# Allegro board motherboard.brd
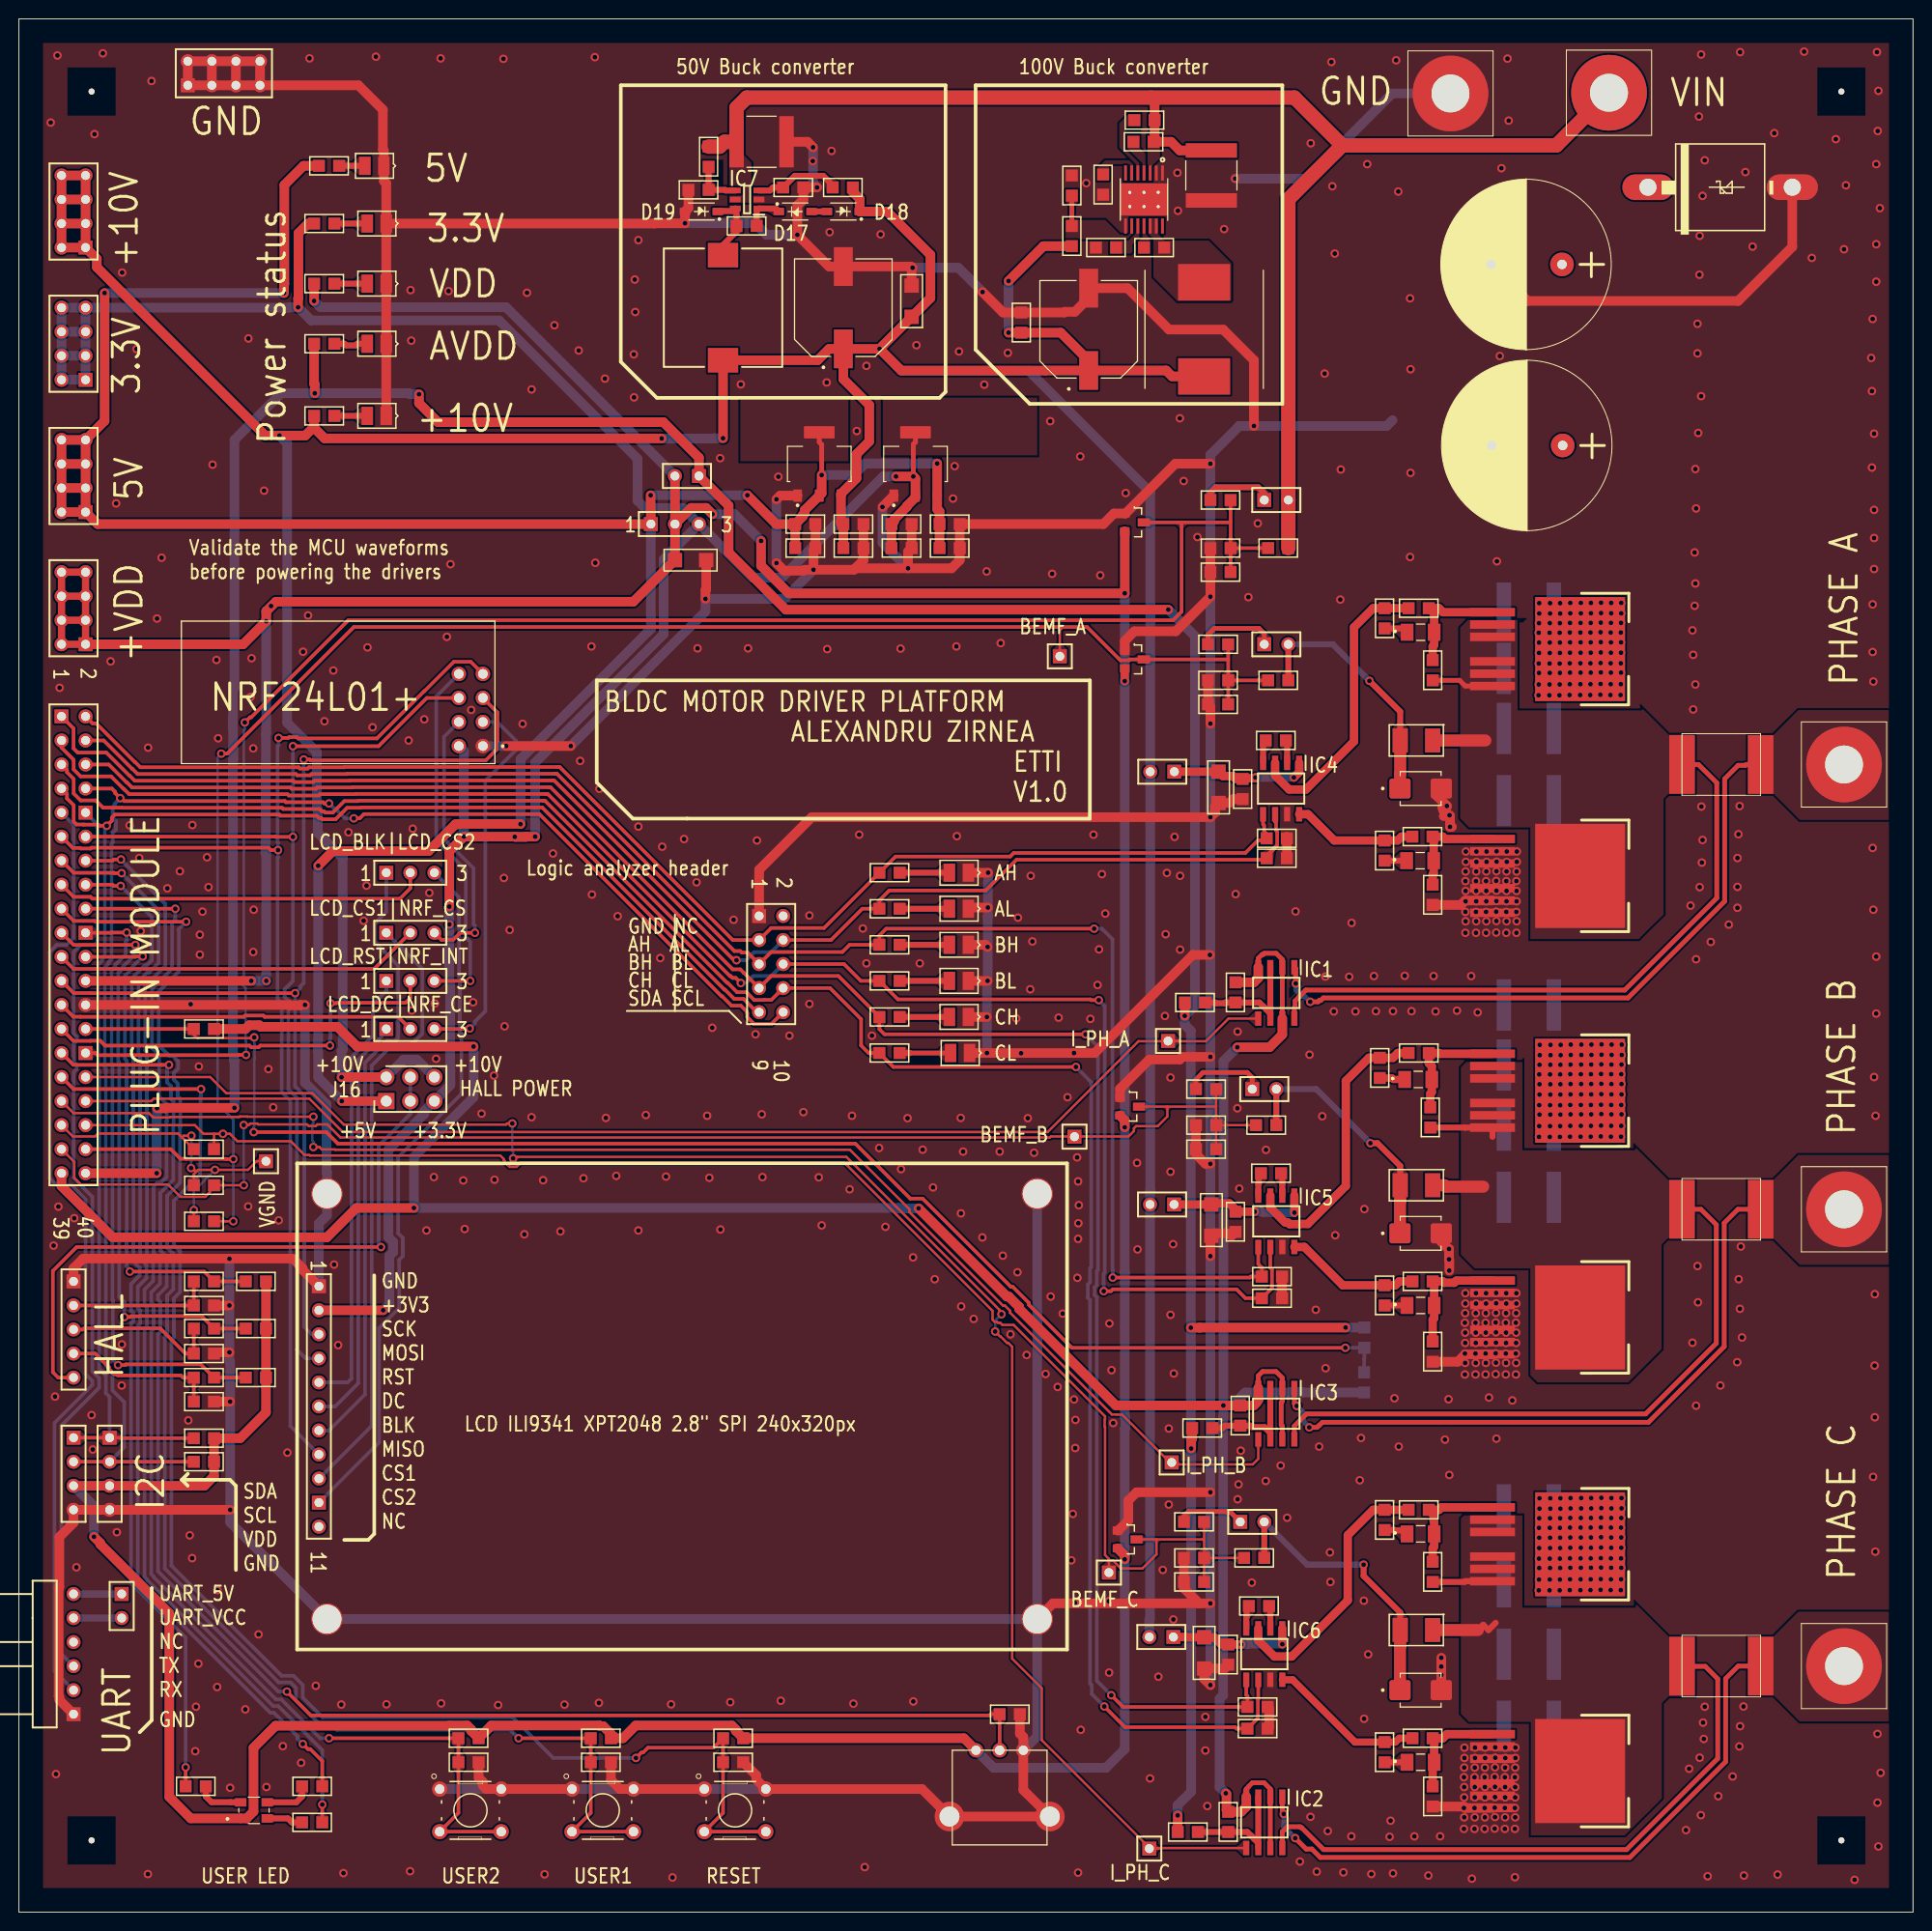
[diagram p0: board, top side]
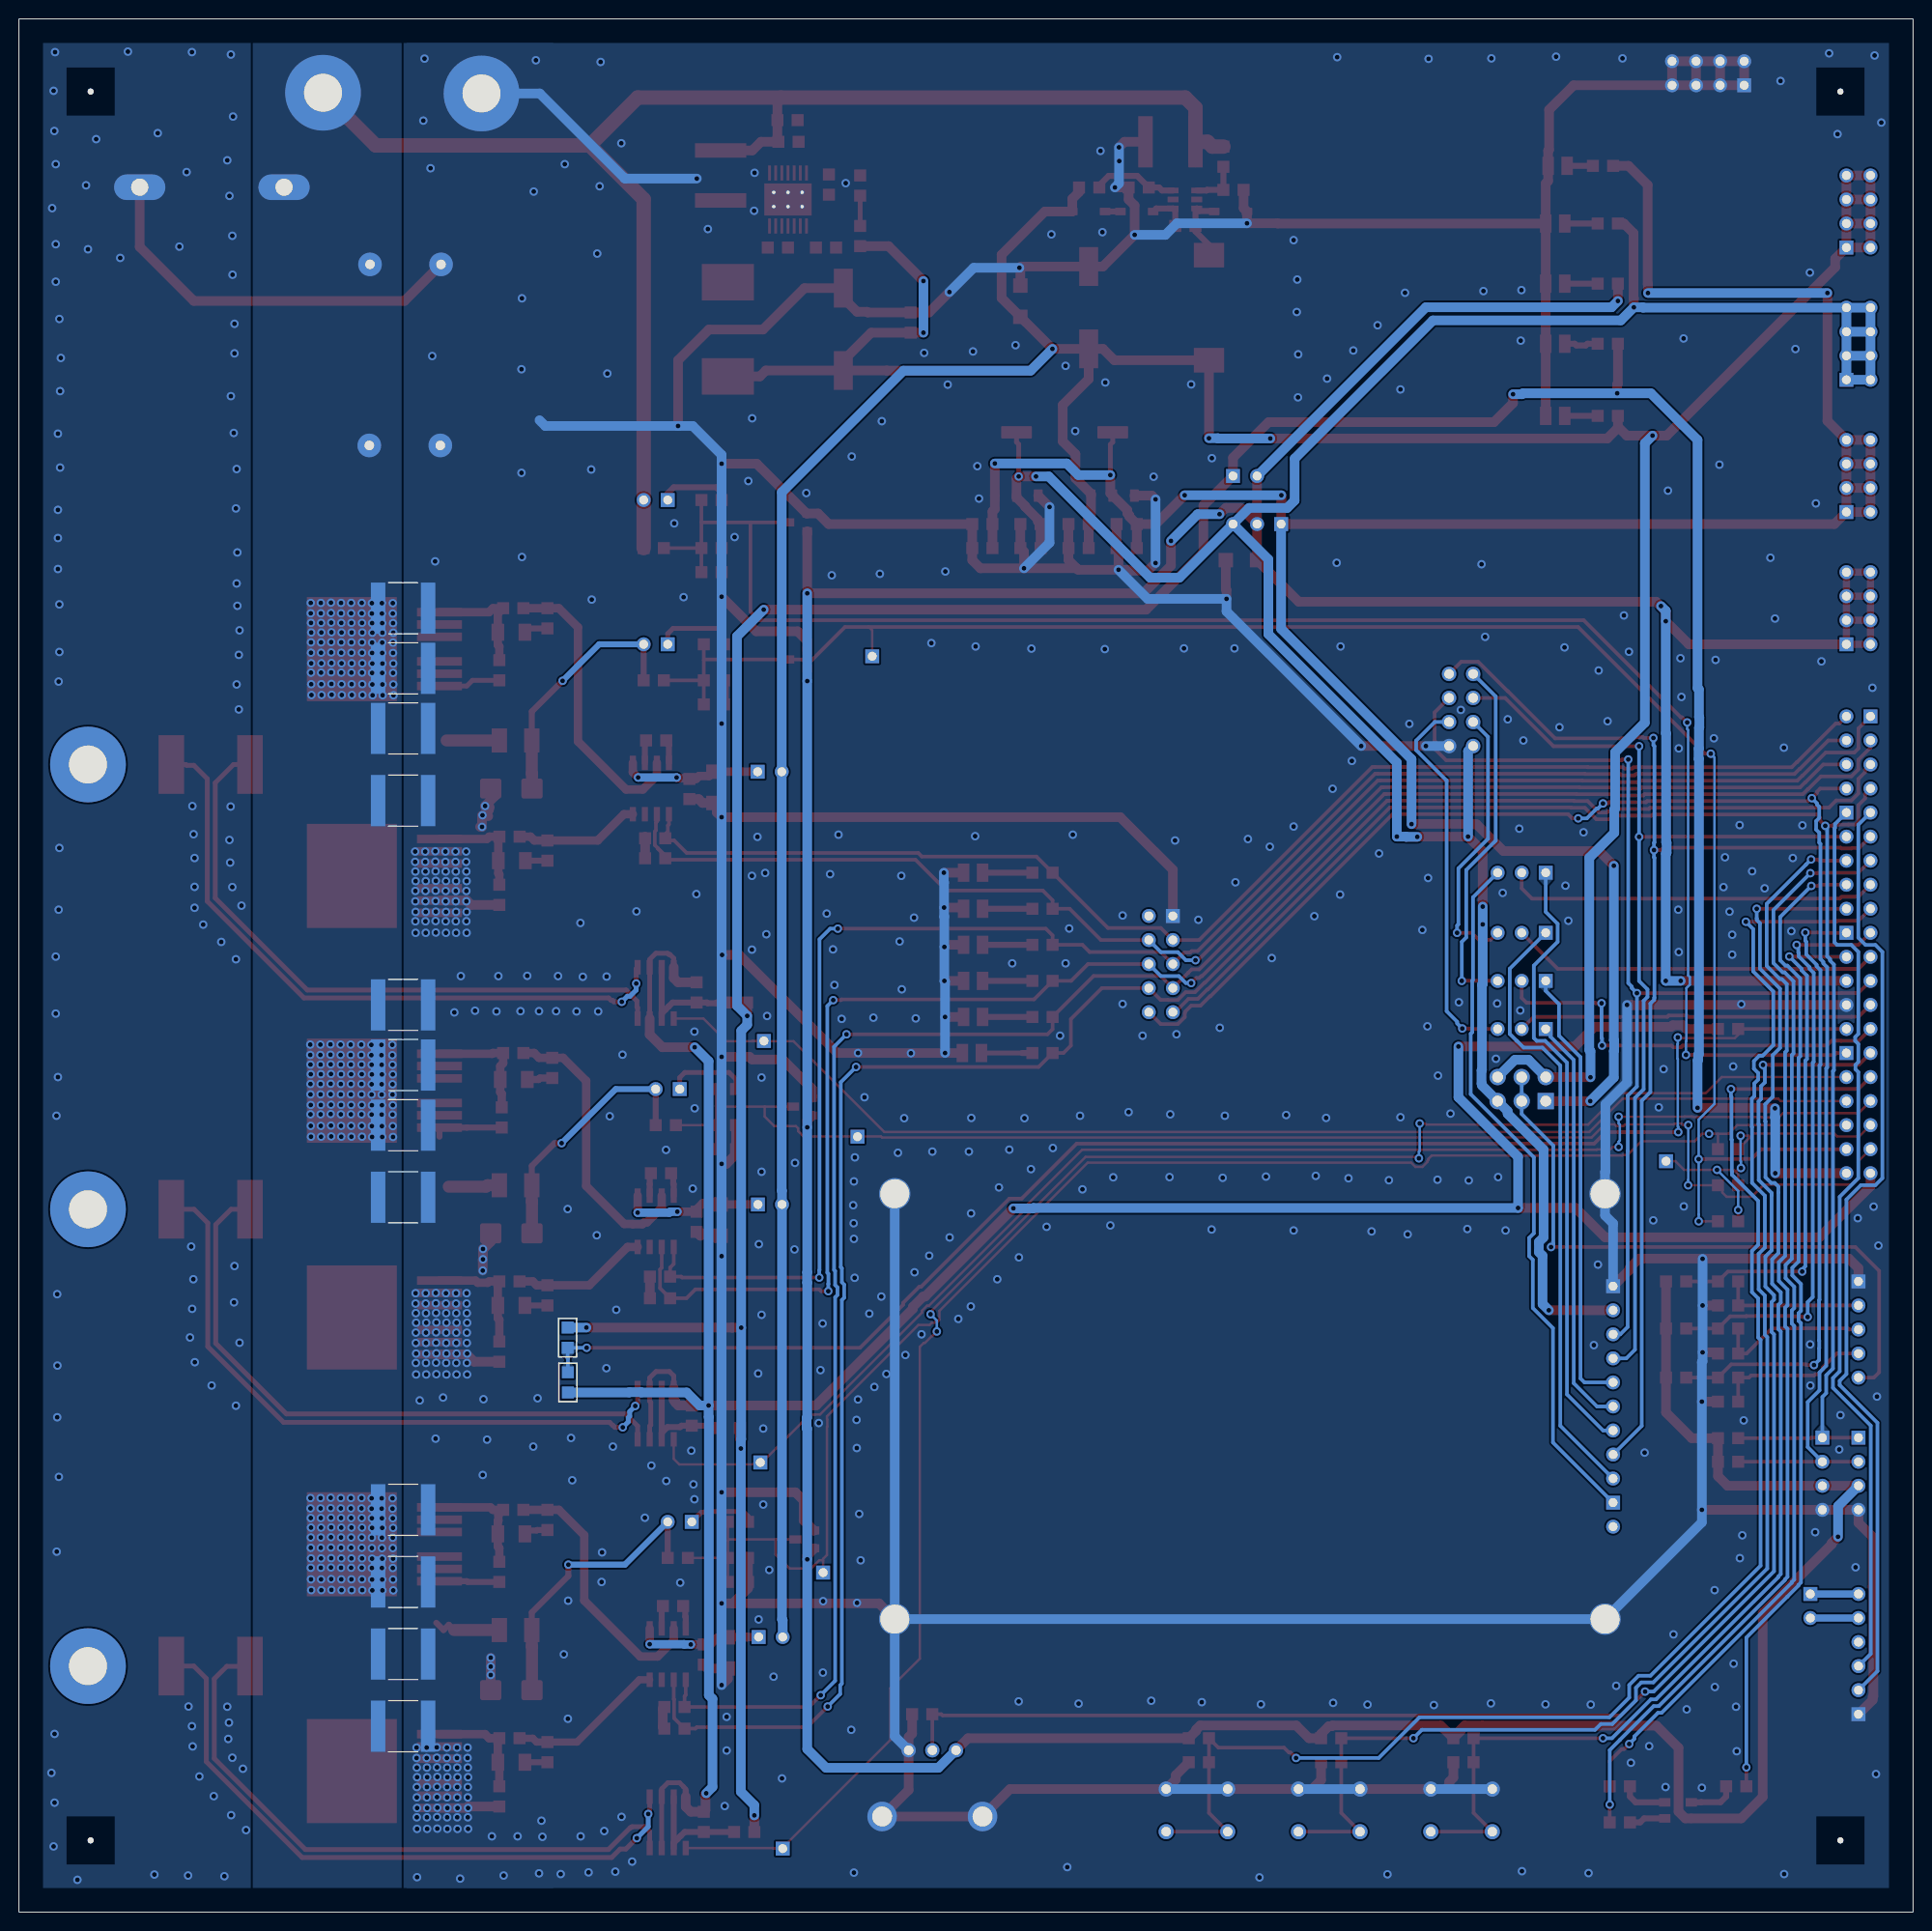
[diagram p1: board, bottom side, seen from below]

Outline 200 x 200 mm; copper layers: TOP, BOTTOM. Coordinates in mm from the lower left corner of the outline.
Outline path: rectangle 0,0 200,200

## Design rules (mm)
constraint set DEFAULT: min track width 0.508, pair gap 0.254

## Placement (name value [footprint] x y rotation side)
C1  1n  [SMC0805]  127.69 127.58 180 top
C2  1n  [SMC0805]  126.42 80.59 180 top
C3  1n  [SMC0805]  125.15 34.87 180 top
C4  1n  [SMC0805]  18.47 53.92 0 top
C5  1n  [SMC0805]  18.47 64.08 0 top
C6  1n  [SMC0805]  18.47 59 0 top
C7  1n  [SMC0805]  74.35 15.82 0 top
C8  1n  [SMC0805]  103.56 20.9 0 top
C9  1n  [SMC0805]  60.38 15.82 0 top
C10  1n  [SMC0805]  46.41 15.82 0 top
C11  10u  [CAPC5750X330N]  159.44 137.74 180 bottom
C12  10u  [CAPC5750X330N]  159.44 131.39 180 bottom
C13  10u  [CAPC5750X330N]  159.44 117.42 180 bottom
C14  10u  [CAPC5750X330N]  159.44 125.04 180 bottom
C15  10u  [CAPC5750X330N]  159.44 95.83 180 bottom
C16  10u  [CAPC5750X330N]  159.44 89.48 180 bottom
C17  10u  [CAPC5750X330N]  159.44 83.13 180 bottom
C18  10u  [CAPC5750X330N]  159.44 75.51 180 bottom
C19  10u  [CAPC5750X330N]  159.44 19.63 180 bottom
C20  10u  [CAPC5750X330N]  159.44 42.49 180 bottom
C21  10u  [CAPC5750X330N]  159.44 34.87 180 bottom
C22  10u  [CAPC5750X330N]  159.44 27.25 180 bottom
C23  1n  [SMC0805]  18.47 93.29 0 top
C24  1u  [SMC0805]  128.45 96.09 90 top
C25  1u  [SMC0805]  127.69 8.46 90 top
C26  1u  [SMC0805]  128.96 51.38 90 top
C27  100n  [SMC0805]  129.21 119.71 270 top
C28  47u  [SMC1206]  126.67 120.47 270 top
C29  10u  [SMC0805]  133.78 123.77 180 top
C30  100n  [SMC0805]  128.45 73.99 270 top
C31  47u  [SMC1206]  125.91 74.75 270 top
C32  10u  [SMC0805]  133.27 78.05 180 top
C33  100n  [SMC0805]  127.69 28.27 270 top
C34  47u  [SMC1206]  125.15 29.03 270 top
C35  10u  [SMC0805]  132 32.33 180 top
C36  100n  [SMC0805]  118.8 175.84 0 top
C37  2.2u  [SMC0805]  105.84 168.99 270 top
C38  560u  [CAP_EEEFT1V561AP]  112.95 167.21 90 top
C39  10n  [SMC0805]  119.81 187.02 180 top
C40  10n  [SMC0805]  114.48 181.43 90 top
C41  2.2u  [SMC0805]  113.72 175.84 0 top
C42  10u  [CAPC5750X330N]  125.91 183.46 270 top
C43  1n  [SMC0805]  87.05 146.63 0 top
C44  1u  [SMC0805]  87.05 144.09 0 top
C45  1u  [SMC0805]  81.97 146.63 0 top
C46  1n  [SMC0805]  81.97 144.09 0 top
C47  100n  [SMC0805]  77.9 178.13 180 top
C48  47u  [SMC1206]  94.26 168.53 90 top
C49  560u  [CAP_EEEFT1V561AP]  87.05 169.49 90 top
C50  1u  [SMC0805]  72.82 181.94 180 top
C51  10u  [CAPC5750X330N]  78.41 187.02 0 top
C52  1n  [SMC0805]  97.21 146.63 0 top
C53  1u  [SMC0805]  97.21 144.09 0 top
C54  1u  [SMC0805]  92.13 146.63 0 top
C55  1n  [SMC0805]  92.13 144.09 0 top
C56  2200u 63V  [UPW1J222MHD]  159.13 174.07 180 top
C57  2200u 63V  [UPW1J222MHD]  159.21 154.94 180 top
C58  47u  [SMC1206]  69.27 142.82 0 top
C59  1n  [SMC0805]  127.94 141.55 180 top
D1  MBRS1100T3G  [DIOM5436X247N]  148.01 118.69 0 top
D2  MBRS1100T3G  [DIOM5436X247N]  148.01 71.7 0 top
D3  MBRS1100T3G  [DIOM5436X247N]  148.01 23.44 0 top
D4  LL-R3528RGBC-008-B  [LED_LL-R3528RGBC-008-B]  24.82 10.74 0 top
D5  LED  [SMD0805]  100.25 109.8 180 top
D6  LED  [SMD0805]  100.25 105.99 180 top
D7  LED  [SMD0805]  100.25 102.18 180 top
D8  LED  [SMD0805]  100.25 98.37 180 top
D9  LED  [SMD0805]  100.25 94.56 180 top
D10  LED  [SMD0805]  100.38 90.75 180 top
D11  SS26FL  [DIO_SS26FL]  148.01 135.2 0 top
D12  SS26FL  [DIO_SS26FL]  147.95 111.07 0 top
D13  SS26FL  [DIO_SS26FL]  147.75 87.96 0 top
D14  SS26FL  [DIO_SS26FL]  148.01 64.08 0 top
D15  SS26FL  [DIO_SS26FL]  148.01 39.95 0 top
D16  SS26FL  [DIO_SS26FL]  148.01 15.82 0 top
D17  BAT41  [SOD3716X135N]  81.97 179.65 0 top
D18  MMSZ7V5T1G  [SOD3716X135N]  87.05 179.65 180 top
D19  BAT41  [SOD3716X135N]  72.06 179.65 180 top
D20  15KP48CA  [DIOAD885W125L910D885]  179.63 182.22 0 top
D21  LED  [SMD0805]  38.79 158.06 180 top
D22  LED  [SMD0805]  38.53 184.48 180 top
D23  LED  [SMD0805]  38.79 178.38 180 top
D24  LED  [SMD0805]  38.79 172.03 180 top
D25  LED  [SMD0805]  38.79 165.68 180 top
DN1  BAT54  [SMSOT23123]  116.76 131.39 270 top
DN2  BAT54  [SMSOT23123]  116.26 84.15 270 top
DN3  BAT54  [SMSOT23123]  116 38.43 270 top
DN4  BAT54  [SMSOT23123]  116.76 145.87 270 top
IC1  INA240A2EDRQ1  [SOIC127P600X175-8N]  132.77 97.1 270 top
IC2  INA240A2EDRQ1  [SOIC127P600X175-8N]  131.5 9.47 270 top
IC3  INA240A2EDRQ1  [SOIC127P600X175-8N]  132.77 52.65 270 top
IC4  MIC4104YM  [SOIC127P599X173-8N]  133.27 118.69 270 top
IC5  MIC4104YM  [SOIC127P599X173-8N]  132.77 72.97 270 top
IC6  MIC4104YM  [SOIC127P599X173-8N]  131.5 27.25 270 top
IC7  MCP16331T-E_CH  [SOT95P280X145-6N]  76.89 180.92 180 top
J1  PHASE A  [POWER_PAD]  192.71 121.23 0 top
J2  PHASE B  [POWER_PAD]  192.71 74.24 0 top
J3  PHASE C  [POWER_PAD]  192.71 25.98 0 top
J4  HEADER 1x2  [BLKCON100VHTM1SQW1002]  131.5 133.93 0 top
J5  HEADER 1x2  [BLKCON100VHTM1SQW1002]  130.23 86.94 0 top
J6  HEADER 1x2  [BLKCON100VHTM1SQW1002]  128.96 41.22 0 top
J7  HEADER 4  [BLKCON100VHTM1SQW1004]  5.77 50.11 270 top
J8  HEADER 4  [BLKCON100VHTM1SQW1004]  9.58 50.11 270 top
J9  JUMPER1  [BLKCON100VHTM1SQW1002]  10.85 33.6 270 top
J10  CON6  [BLKCON100RHTM1SQW4256]  5.77 20.9 90 top
J11  30340-5002HB  [BLKCON100VHTM2OEW20040]  4.5 126.31 270 top
J12  HEADER 4X2  [BLKCON100VHTM2OEW2008]  7.04 175.84 90 top
J13  HEADER 4X2  [BLKCON100VHTM2OEW2008]  7.04 147.9 90 top
J14  HEADER 4X2  [BLKCON100VHTM2OEW2008]  7.04 161.87 90 top
J15  HEADER 4X2  [BLKCON100VHTM2OEW2008]  7.04 133.93 90 top
J16  10129381-906002BLF  [HDRV6W67P254_2X3_762X483X858P]  38.79 85.67 0 top
J17  HEADER 4X2  [BLKCON100VHTM2OEW2008]  17.83 192.99 0 top
J18  CON5  [BLKCON100VHTM1SQW1005]  5.77 66.62 270 top
J19  CON3  [BLKCON100VHTM1SQW1003]  38.79 109.8 0 top
J20  CON3  [BLKCON100VHTM1SQW1003]  38.79 103.45 0 top
J21  CON3  [BLKCON100VHTM1SQW1003]  38.79 98.37 0 top
J22  CON3  [BLKCON100VHTM1SQW1003]  38.79 93.29 0 top
J23  CON1  [BLKCON100VHTM1SQW1001]  121.34 92.02 0 top
J24  HEADER 5X2  [BLKCON100VHTM2OEW20010]  78.16 105.23 270 top
J25  CON1  [BLKCON100VHTM1SQW1001]  121.72 47.5 0 top
J26  CON1  [BLKCON100VHTM1SQW1001]  119.35 6.71 0 top
J27  CON1  [BLKCON100VHTM1SQW1001]  109.91 132.66 0 top
J28  CON1  [BLKCON100VHTM1SQW1001]  111.46 81.92 0 top
J29  CON1  [BLKCON100VHTM1SQW1001]  115.09 35.86 0 top
J30  CON1  [BLKCON100VHTM1SQW1001]  26.09 79.32 0 top
J31  CON11  [ILI9341_2_8INCH]  31.67 53.42 270 top
J32  HEADER 1x2  [BLKCON100VHTM1SQW1002]  122 120.47 180 top
J33  HEADER 1x2  [BLKCON100VHTM1SQW1002]  121.97 74.75 180 top
J34  HEADER 1x2  [BLKCON100VHTM1SQW1002]  121.89 29.06 180 top
J35  VIN  [POWER_PAD]  167.89 192.2 0 top
J36  GND  [POWER_PAD]  151.16 192.13 0 top
J37  HEADER 1x2  [BLKCON100VHTM1SQW1002]  131.5 149.17 0 top
J38  HEADER 3  [BLKCON100VHTM1SQW1003]  66.73 146.63 0 top
J39  HEADER 1x2  [BLKCON100VHTM1SQW1002]  71.81 151.71 180 top
L1  100u  [INDM1250X1250X600]  125.15 167.21 270 top
L2  100uH  [INDP125125X785N]  74.35 169.49 270 top
NOREF  -  [unnamed]  192.43 7.57 0 top
NOREF#2  -  [unnamed]  7.67 7.57 0 top
NOREF#3  -  [unnamed]  7.67 192.33 0 top
NOREF#4  -  [unnamed]  192.43 192.33 0 top
Q1  IPB039N10N3_G  [PG-TO263-3]  169.6 133.42 180 top
Q2  IPB039N10N3_G  [PG-TO263-3]  169.6 86.77 180 top
Q3  IPB039N10N3_G  [PG-TO263-3]  169.6 38.85 180 top
Q4  IPB039N10N3_G  [PG-TO263-3]  169.6 109.46 180 top
Q5  IPB039N10N3_G  [PG-TO263-3]  169.6 62.81 180 top
Q6  IPB039N10N3_G  [PG-TO263-3]  169.6 14.89 180 top
R1  47k  [SMR0805]  134.04 130.12 180 top
R2  47k  [SMR0805]  125.55 133.93 0 top
R3  47k  [SMR0805]  132.77 83.13 180 top
R4  47k  [SMR0805]  124.28 86.94 0 top
R5  47k  [SMR0805]  131.5 37.41 180 top
R6  47k  [SMR0805]  123.01 41.22 0 top
R7  5.1k  [SMR0805]  127.69 130.12 180 top
R8  5.1k  [SMR0805]  126.42 83.13 180 top
R9  5.1k  [SMR0805]  125.15 37.41 180 top
R10  3.3R  [SMR1210]  149.28 123.77 180 top
R11  110k  [SMR0805]  18.47 80.59 0 top
R12  110k  [SMR0805]  18.47 76.78 0 top
R13  3.3R  [SMR1210]  149.28 76.78 180 top
R14  110k  [SMR0805]  18.47 72.97 0 top
R15  3.3R  [SMR1210]  149.28 29.79 180 top
R16  4k7  [SMR0805]  20.6 47.57 180 top
R17  4k7  [SMR0805]  20.6 50.06 180 top
R18  2k2  [SMR0805]  26.09 56.46 180 top
R19  3k3  [SMR0805]  18.47 56.46 0 top
R20  2k2  [SMR0805]  26.09 66.62 180 top
R21  2k2  [SMR0805]  26.09 61.65 180 top
R22  3k3  [SMR0805]  18.47 66.62 0 top
R23  3k3  [SMR0805]  18.47 61.65 0 top
R24  10k  [SMR0805]  74.35 18.36 0 top
R25  1k  [SMR0805]  29.9 9.47 0 top
R26  1k  [SMR0805]  29.9 13.28 0 top
R27  1k  [SMR0805]  19.74 13.28 180 top
R28  10k  [RK09D117000B]  103.56 17.09 180 top
R29  10k  [SMR0805]  60.38 18.36 0 top
R30  1k  [SMR0805]  90.86 109.8 0 top
R31  1k  [SMR0805]  90.86 105.99 0 top
R32  10k  [SMR0805]  46.41 18.36 0 top
R33  1k  [SMR0805]  90.86 102.18 0 top
R34  1k  [SMR0805]  90.86 98.37 0 top
R35  1k  [SMR0805]  90.86 94.56 0 top
R36  1k  [SMR0805]  90.86 90.75 0 top
R37  0.001R  [CSS2H-3920R]  179.76 121.23 0 top
R38  0.001R  [CSS2H-3920R]  179.76 74.24 0 top
R39  0.001R  [CSS2H-3920R]  179.76 25.98 0 top
R40  10k  [SMR0805]  142.04 57.02 270 bottom
R41  0R  [SMR0805]  123.11 96.09 0 top
R42  0R  [SMR0805]  122.35 8.46 0 top
R43  0R  [SMR0805]  123.88 51.13 0 top
R44  20R  [SMR0805]  146.74 137.74 0 top
R45  5R  [SMR0805]  144.2 137.74 270 top
R46  330k  [SMR0805]  149.28 130.12 90 top
R47  20R  [SMR0805]  149.26 113.61 180 top
R48  10k  [SMR0805]  131.75 113.44 0 top
R49  10k  [SMR0805]  131.75 111.33 0 top
R50  5R  [SMR0805]  144.2 111.07 90 top
R51  330k  [SMR0805]  149.28 108.53 270 top
R52  20R  [SMR0805]  146.74 90.75 0 top
R53  5R  [SMR0805]  143.69 90.25 270 top
R54  330k  [SMR0805]  149.02 82.88 90 top
R55  10k  [SMR0805]  131.24 67.13 0 top
R56  10k  [SMR0805]  131.24 64.85 0 top
R57  20R  [SMR0805]  149.28 66.62 180 top
R58  5R  [SMR0805]  144.2 64.08 90 top
R59  330k  [SMR0805]  149.28 60.27 270 top
R60  20R  [SMR0805]  146.74 42.49 0 top
R61  10k  [SMR0805]  129.72 21.67 0 top
R62  10k  [SMR0805]  129.72 19.38 0 top
R63  5R  [SMR0805]  144.2 42.49 270 top
R64  330k  [SMR0805]  149.28 34.87 90 top
R65  20R  [SMR0805]  149.28 18.36 180 top
R66  5R  [SMR0805]  144.2 15.82 90 top
R67  330k  [SMR0805]  149.28 13.28 270 top
R68  10k  [SMR0805]  111.18 178.13 270 top
R69  402k  [SMR0805]  117.78 189.31 0 top
R70  2k  [SMR0805]  111.18 183.46 270 top
R71  110k  [SMR0805]  72.82 186.51 270 top
R72  110k  [SMR0805]  88.06 182.19 180 top
R73  10k  [SMR0805]  80.7 182.19 0 top
R74  1k  [SMR0805]  31.17 158.06 0 top
R75  1k  [SMR0805]  31.67 184.48 0 top
R76  1k  [SMR0805]  31.17 178.38 0 top
R77  1k  [SMR0805]  31.17 172.03 0 top
R78  1k  [SMR0805]  31.17 165.68 0 top
R79  47k  [SMR0805]  134.04 144.09 180 top
R80  47k  [SMR0805]  125.81 149.17 0 top
R81  5.1k  [SMR0805]  127.94 144.09 180 top
RT1  10k NTC  [SMR0805]  142.06 61.75 270 bottom
SW1  B3F-1000  [SW_B3F-1000]  75.62 10.74 0 top
SW2  B3F-1000  [SW_B3F-1000]  61.65 10.74 0 top
SW3  B3F-1000  [SW_B3F-1000]  47.68 10.74 0 top
U1  NRF24L01P-MODULE-PCB  [XCVR_NRF24L01P-MODULE-PCB]  33.71 128.85 180 top
U2  LM5161PWPR  [IC_TPS27S100BPWPR]  118.8 180.92 270 top
U3  AMS1117-5V  [SOT229P700X180-4N]  84.51 152.98 0 top
U4  AMS1117-33  [SOT229P700X180-4N]  94.67 152.98 0 top

## Library data of the parts
C1-C37 C39-C48 C50-C55 C58 C59 = CAP NP
C38 C49 C56 C57 = CAP
D1-D3 = DIODE SCHOTTKY
D4 = LL-R3528RGBC-008-B
D5-D10 D21-D25 = LED_0
D11-D17 D19 = DIODE
D18 = DIODE ZENER
D20 = DIODE TAZ BI-DIR_0
DN1-DN4 = DIODE_DUAL_RS_AKJ
IC1-IC3 = INA240A2EDRQ1
IC4-IC6 = MIC4104YM
IC7 = MCP16331T-E_CH
J1-J3 J23 J25-J30 J35 J36 = CON1
J4-J6 J32-J34 J37 J39 = HEADER 1x2
J7 J8 = HEADER 4
J9 = JUMPER1
J10 = CON6
J11 = 30340-5002HB
J12-J15 J17 = HEADER 4X2
J16 = 10129381-906002BLF
J18 = CON5
J19-J22 = CON3
J24 = HEADER 5X2
J31 = CON11_0
J38 = HEADER 3
L1 L2 = INDUCTOR
Q1-Q6 = IPB039N10N3_G
R1-R27 R29-R81 = RESISTOR
R28 = POT_0
RT1 = NTC
SW1-SW3 = B3F-1000
U1 = NRF24L01P-MODULE-PCB
U2 = LM5161PWPR_1
U3 U4 = AMS1117-33_2

## Footprints (pads in the part's own frame, mm; a bottom-side part is the same pattern mirrored in y, then rotated)
BLKCON100RHTM1SQW4256
  rect 1.473x1.473 hole 0.94: 1(0,0)
  round 1.473 hole 0.94: 2(2.54,0) 3(5.08,0) 4(7.62,0) 5(10.16,0) 6(12.7,0)
BLKCON100VHTM1SQW1001
  rect 1.473x1.473 hole 0.94: 1(0,0)
BLKCON100VHTM1SQW1002
  rect 1.473x1.473 hole 0.94: 1(0,0)
  round 1.473 hole 0.94: 2(2.54,0)
BLKCON100VHTM1SQW1003
  rect 1.473x1.473 hole 0.94: 1(0,0)
  round 1.473 hole 0.94: 2(2.54,0) 3(5.08,0)
BLKCON100VHTM1SQW1004
  rect 1.473x1.473 hole 0.94: 1(0,0)
  round 1.473 hole 0.94: 2(2.54,0) 3(5.08,0) 4(7.62,0)
BLKCON100VHTM1SQW1005
  rect 1.473x1.473 hole 0.94: 1(0,0)
  round 1.473 hole 0.94: 2(2.54,0) 3(5.08,0) 4(7.62,0) 5(10.16,0)
BLKCON100VHTM2OEW2008
  rect 1.473x1.473 hole 0.94: 1(0,0)
  round 1.473 hole 0.94: 2(0,2.54) 3(2.54,0) 4(2.54,2.54) 5(5.08,0) 6(5.08,2.54) 7(7.62,0) 8(7.62,2.54)
BLKCON100VHTM2OEW20010
  rect 1.473x1.473 hole 0.94: 1(0,0)
  round 1.473 hole 0.94: 2(0,2.54) 3(2.54,0) 4(2.54,2.54) 5(5.08,0) 6(5.08,2.54) 7(7.62,0) 8(7.62,2.54) 9(10.16,0) 10(10.16,2.54)
BLKCON100VHTM2OEW20040
  rect 1.473x1.473 hole 0.94: 1(0,0) 10(10.16,2.54) 20(22.86,2.54) 30(35.56,2.54)
  round 1.473 hole 0.94: 2(0,2.54) 3(2.54,0) 4(2.54,2.54) 5(5.08,0) 6(5.08,2.54) 7(7.62,0) 8(7.62,2.54) 9(10.16,0) 11(12.7,0) 12(12.7,2.54) 13(15.24,0) 14(15.24,2.54) 15(17.78,0) 16(17.78,2.54) 17(20.32,0) 18(20.32,2.54) 19(22.86,0) 21(25.4,0) 22(25.4,2.54) 23(27.94,0) 24(27.94,2.54) 25(30.48,0) 26(30.48,2.54) 27(33.02,0) 28(33.02,2.54) 29(35.56,0) 31(38.1,0) 32(38.1,2.54) 33(40.64,0) 34(40.64,2.54) 35(43.18,0) 36(43.18,2.54) 37(45.72,0) 38(45.72,2.54) 39(48.26,0) 40(48.26,2.54)
CAP_EEEFT1V561AP
  rect 4.1x2 smd: 1(-4.35,0) 2(4.35,0)
CAPC5750X330N
  rect 1.53x5.41 smd: 1(-2.639,0) 2(2.639,0)
CSS2H-3920R
  rect 2.7x6.2 smd: 1(-4.15,0) 2(4.15,0)
DIO_SS26FL
  rect 1.34x1.8 smd: 1(-1.43,0) 2(1.43,0)
DIOAD885W125L910D885
  oval 5.41x2.705 hole 1.803: A(7.62,0) C(-7.62,0)
DIOM5436X247N
  custom 2.25x2.12 smd: 1(2.18,0) 2(-2.18,0)
HDRV6W67P254_2X3_762X483X858P
  rect 1.725x1.725 hole 1.15: 1(0,0)
  round 1.725 hole 1.15: 2(0,2.54) 3(2.54,0) 4(2.54,2.54) 5(5.08,0) 6(5.08,2.54)
IC_TPS27S100BPWPR
  rect 1.6x0.3 smd: 1(-2.8,1.95) 2(-2.8,1.3) 3(-2.8,0.65) 4(-2.8,0) 5(-2.8,-0.65) 6(-2.8,-1.3) 7(-2.8,-1.95) 8(2.8,-1.95) 9(2.8,-1.3) 10(2.8,-0.65) 11(2.8,0) 12(2.8,0.65) 13(2.8,1.3) 14(2.8,1.95)
  rect 3.4x5 smd: 15(0,0)
  round 0.44 hole 0.33: 16(-0.75,1.5) 17(0.75,1.5) 18(-0.75,0) 19(0.75,0) 20(-0.75,-1.5) 21(0.75,-1.5)
ILI9341_2_8INCH
  rect 1.473x1.473 hole 0.94: 1(-12.7,0) 10(10.16,0)
  round 1.473 hole 0.94: 2(-10.16,0) 3(-7.62,0) 4(-5.08,0) 5(-2.54,0) 6(0,0) 7(2.54,0) 8(5.08,0) 9(7.62,0) 11(12.7,0)
  round 3.302 hole 3.048: 12(-22.469,0.851) 13(22.469,0.851) 14(22.469,75.849) 15(-22.469,75.849)
INDM1250X1250X600
  rect 3.85x5.5 smd: 1(-4.975,0) 2(4.975,0)
INDP125125X785N
  rect 2.6x3.2 smd: 1(-5.55,0) 2(5.55,0)
LED_LL-R3528RGBC-008-B
  rect 1.2x0.9 smd: 1(-1.4,-0.85) 2(1.4,-0.85) 3(1.4,0.85) 4(-1.4,0.85)
PG-TO263-3
  rect 4.75x0.9 smd: 1(14,-3.9) 2(14,-2.6) 3(14,-1.3) 4(14,1.3) 5(14,2.6) 6(14,3.9)
  rect 9.5x11 smd: 7(4.75,0)
POWER_PAD
  round 8 hole 4: 1(0,0)
RK09D117000B
  round 1.508 hole 1: 1(-2.5,0) 2(0,0) 3(2.5,0)
  round 3.116 hole 2.1: K1(-5.3,7) K2(5.3,7)
SMC0805
  rect 1.27x1.27 smd: 1(0,0) 2(2.134,0)
SMC1206
  rect 1.524x1.524 smd: 1(0,0) 2(3.302,0)
SMD0805
  rect 1.219x1.93 smd: A(2.007,0) C(0,0)
SMR0805
  rect 1.27x1.27 smd: 1(0,0) 2(2.134,0)
SMR1210
  rect 1.626x2.54 smd: 1(0,0) 2(3.429,0)
SMSOT23123
  rect 0.864x1.016 smd: 1(-1.88,0) 2(0,0)
  rect 0.864x1.27 smd: 3(-0.94,2.007)
SOD3716X135N
  custom 1.12x0.8 smd: 1(-1.73,0) 2(1.73,0)
SOIC127P599X173-8N
  rect 1.525x0.65 smd: 1(-2.712,1.905) 2(-2.712,0.635) 3(-2.712,-0.635) 4(-2.712,-1.905) 5(2.712,-1.905) 6(2.712,-0.635) 7(2.712,0.635) 8(2.712,1.905)
SOIC127P600X175-8N
  rect 1.528x0.65 smd: 1(-2.711,1.905) 2(-2.711,0.635) 3(-2.711,-0.635) 4(-2.711,-1.905) 5(2.711,-1.905) 6(2.711,-0.635) 7(2.711,0.635) 8(2.711,1.905)
SOT95P280X145-6N
  rect 1.15x0.6 smd: 1(-1.25,0.95) 2(-1.25,0) 3(-1.25,-0.95) 4(1.25,-0.95) 5(1.25,0) 6(1.25,0.95)
SOT229P700X180-4N
  custom 0.93x1.31 smd: 1(-2.29,-3.345) 2(0,-3.345) 3(2.29,-3.345)
  custom 3.24x1.31 smd: 4(0,3.345)
SW_B3F-1000
  round 1.6 hole 1: 1(-3.25,2.25) 2(3.25,2.25) 3(-3.25,-2.25) 4(3.25,-2.25)
unnamed
  round 0.635 hole 3.175 unplated: (0,0)
UPW1J222MHD
  round 2.5 hole 1: 1(-3.8,0) 2(3.7,0)
XCVR_NRF24L01P-MODULE-PCB
  round 1.524 hole 1.016: 1(-15.284,5.669) 2(-12.744,5.669) 3(-15.284,3.129) 4(-12.744,3.129) 5(-15.284,0.589) 6(-12.744,0.589) 7(-15.284,-1.951) 8(-12.744,-1.951)

## Nets
+3V3: C54.1 C55.1 J14.1 J14.2 J14.3 J14.4 J14.5 J14.6 J14.7 J14.8 J16.5 J31.2 J38.3 R76.1 U1.2(VDD) U4.2(VOUT) U4.4
+5V: C45.1 C46.1 C52.1 C53.1 J13.1 J13.2 J13.3 J13.4 J13.5 J13.6 J13.7 J13.8 J16.1 J38.1 R75.1 U3.2(VOUT) U3.4 U4.3
+10V: C37.2 C38.1 C43.1 C44.1 C48.1 C49.1 D18.1(CATHODE) J12.1 J12.2 J12.3 J12.4 J12.5 J12.6 J12.7 J12.8 J16.2 J16.6 J32.2 J33.2 J34.2 L1.2 L2.2 R68.2 R72.1 R74.1 U3.3
AVDD: J11.40 J39.1 R41.1 R42.1 R43.1 R78.1 RT1.1
GND: C1.2 C2.2 C3.2 C4.2 C5.2 C6.2 C7.2 C8.2 C9.2 C10.2 C11.2 C12.2 C13.2 C14.2 C15.2 C16.2 C17.2 C18.2 C19.2 C20.2 C21.2 C22.2 C27.2 C28.2 C30.2 C31.2 C33.2 C34.2 C37.1 C38.2 C40.1 C41.1 C42.2 C43.2 C44.2 C45.2 C46.2 C48.2 C49.2 C50.2 C51.2 C52.2 C53.2 C54.2 C55.2 C56.2 C57.2 C58.2 C59.2 D1.1 D2.1 D3.1 D5.C(CATHODE) D6.C(CATHODE) D7.C(CATHODE) D8.C(CATHODE) D9.C(CATHODE) D10.C(CATHODE) D19.2 D20.A D21.C(CATHODE) D22.C(CATHODE) D23.C(CATHODE) D24.C(CATHODE) D25.C(CATHODE) DN1.1 DN2.1 DN3.1 DN4.1 IC4.7(VSS) IC5.7(VSS) IC6.7(VSS) IC7.2 J7.4 J8.4 J10.1 J11.26 J17.1 J17.2 J17.3 J17.4 J17.5 J17.6 J17.7 J17.8 J18.1 J24.1 J31.1 J31.12 J31.13 J31.14 J31.15 J36.1 Q4.2 Q4.3 Q4.4 Q4.5 Q4.6(S_5) Q5.2 Q5.3 Q5.4 Q5.5 Q5.6(S_5) Q6.2 Q6.3 Q6.4 Q6.5 Q6.6(S_5) R7.2 R8.2 R9.2 R28.1 R28.K1 R28.K2 R48.2 R49.2 R51.2 R55.2 R56.2 R59.2 R61.2 R62.2 R67.2 R70.1 R73.2 R81.2 SW1.1 SW1.2 SW2.1 SW2.2 SW3.1 SW3.2 U1.1 U2.1 U2.2 U2.8 U2.15 U2.16 U2.17 U2.18 U2.19 U2.20 U2.21 U3.1 U4.1
VBUS: C11.1 C12.1 C13.1 C14.1 C15.1 C16.1 C17.1 C18.1 C19.1 C20.1 C21.1 C22.1 C39.1 C42.1 C51.1 C56.1 C57.1 D20.C(2) IC7.5(VIN) J35.1 J37.2 Q1.7 Q2.7 Q3.7 R69.2 R71.1 R79.1 U2.3(VIN)
VBUS_LOW: C59.1 DN4.3 J11.30 R79.2 R80.2 R81.1
VDD: C58.1 D4.1(COMM_ANODE) DN1.2 DN2.2 DN3.2 DN4.2 J7.3 J8.3 J11.24 J15.1 J15.2 J15.3 J15.4 J15.5 J15.6 J15.7 J15.8 J38.2 J39.2 R16.1 R17.1 R18.1 R20.1 R21.1 R24.2 R28.3 R29.2 R32.2 R77.1
0: C23.2 C24.2 C25.2 C26.2 IC1.2 IC1.4 IC1.7 IC2.2 IC2.4 IC2.7 IC3.2 IC3.4 IC3.7 J11.39 R40.2
ANALOG_POT: C8.1 J11.29 R28.2(WIPER)
BEMF_PHASE_A_LOW: C1.1 DN1.3 J11.38 J27.1 R1.2 R2.2 R7.1 R14.2
BEMF_PHASE_B_LOW: C2.1 DN2.3 J11.37 J28.1 R3.2 R4.2 R8.1 R12.2
BEMF_PHASE_C_LOW: C3.1 DN3.3 J11.36 J29.1 R5.2 R6.2 R9.1 R11.2
BEMF_VGND_LOW: J11.35 J30.1 R11.1 R12.1 R14.1
DRV_AH_DIO: D11.1(K) R45.2
DRV_AL_DIO: D12.1(K) R50.1
DRV_BH_DIO: D13.1(K) R53.2
DRV_BL_DIO: D14.1(K) R58.1
DRV_CH_DIO: D15.1(K) R63.2
DRV_CL_DIO: D16.1(K) R66.1
DRV_GATE_AH: D11.2 Q1.1 R44.2 R46.2
DRV_GATE_AL: D12.2 Q4.1 R47.1 R51.1
DRV_GATE_BH: D13.2 Q2.1 R52.2 R54.2
DRV_GATE_BL: D14.2 Q5.1 R57.1 R59.1
DRV_GATE_CH: D15.2 Q3.1 R60.2 R64.2
DRV_GATE_CL: D16.2 Q6.1 R65.1 R67.1
DRV_PHASE_A: IC1.8 Q1.2 Q1.3 Q1.4 Q1.5 Q1.6(S_5) Q4.7 R10.1 R37.1 R46.1
DRV_PHASE_B: IC3.8 Q2.2 Q2.3 Q2.4 Q2.5 Q2.6(S_5) Q5.7 R13.1 R38.1 R54.1
DRV_PHASE_C: IC2.8 Q3.2 Q3.3 Q3.4 Q3.5 Q3.6(S_5) Q6.7 R15.1 R39.1 R64.1
GPIO: J11.25 J22.2
HALL_A: J11.20 R18.2 R19.2
HALL_A_UNFIL: C4.1 J18.4 R19.1
HALL_B: J11.19 R21.2 R23.2
HALL_B_UNFIL: C6.1 J18.3 R23.1
HALL_C: J11.22 R20.2 R22.2
HALL_C_UNFIL: C5.1 J18.2 R22.1
HALL_VOLTAGE: J16.3 J16.4 J18.5
I2C_SCL: J7.2 J8.2 J11.8 J24.10 R16.2
I2C_SDA: J7.1 J8.1 J11.7 J24.9 R17.2
I_PHASE_A_LOW: IC1.5 J11.34 J23.1
I_PHASE_B_LOW: IC3.5 J11.33 J25.1
I_PHASE_C_LOW: IC2.5 J11.32 J26.1
INT: J11.27 J21.2
LCD_BLK: J19.1 J31.7
LCD_CS1: J20.1 J31.9
LCD_CS2: J19.3 J31.10
LCD_DC: J22.1 J31.6
LCD_RST: J21.1 J31.5
LED_RGB_BLUE: J11.16 R27.2
LED_RGB_GREEN: J11.13 R26.2
LED_RGB_RED: J11.14 R25.2
MISO: J11.11 J31.8 U1.7
MOSI: J11.12 J31.4 U1.6
NRF_CE: J22.3 U1.3
NRF_CS: J20.3 U1.4
NRF_INT: J21.3 U1.8
NTC_TEMP: C23.1 J11.28 R40.1 RT1.2
PH_A_BEMF_DOUBLER: J4.1 R2.1
PH_A_DRIVER_OUT_HS: IC4.3 R44.1 R45.1
PH_A_DRIVER_OUT_LS: IC4.8 R47.2 R50.2
PH_A_DRV_POWER: C27.1 C28.1 IC4.1 J32.1
PH_A_I_AMP_PWR: C24.1 IC1.3 IC1.6(VS) R41.2
PH_B_BEMF_DOUBLER: J5.1 R4.1
PH_B_DRIVER_OUT_HS: IC5.3 R52.1 R53.1
PH_B_DRIVER_OUT_LS: IC5.8 R57.2 R58.2
PH_B_DRV_POWER: C30.1 C31.1 IC5.1 J33.1
PH_B_I_AMP_PWR: C26.1 IC3.3 IC3.6(VS) R43.2
PH_C_BEMF_DOUBLER: J6.1 R6.1
PH_C_DRIVER_OUT_HS: IC6.3 R60.1 R63.1
PH_C_DRIVER_OUT_LS: IC6.8 R65.2 R66.2
PH_C_DRV_POWER: C33.1 C34.1 IC6.1 J34.1
PH_C_I_AMP_PWR: C25.1 IC2.3 IC2.6(VS) R42.2
PHASE_A_OUT: IC1.1 J1.1 R37.2
PHASE_A_PROT: D1.2(CATHODE) J4.2 R1.1 R10.2
PHASE_B_OUT: IC3.1 J2.1 R38.2
PHASE_B_PROT: D2.2(CATHODE) J5.2 R3.1 R13.2
PHASE_C_OUT: IC2.1 J3.1 R39.2
PHASE_C_PROT: D3.2(CATHODE) J6.2 R5.1 R15.2
PWMAH: IC4.5 J11.2 J24.3 R30.1 R48.1
PWMAL: IC4.6 J11.1 J24.4 R31.1 R49.1
PWMBH: IC5.5 J11.4 J24.5 R33.1 R55.1
PWMBL: IC5.6 J11.3 J24.6 R34.1 R56.1
PWMCH: IC6.5 J11.6 J24.7 R35.1 R61.1
PWMCL: IC6.6 J11.5 J24.8 R36.1 R62.1
RST: C7.1 J11.31 R24.1 SW1.3 SW1.4
RX: J10.2 J11.9
SCK: J11.23 J31.3 U1.5
SPI_CS1: J11.21 J20.2
SPI_CS2: J11.15 J19.2
SW1: C10.1 J11.18 R32.1 SW3.3 SW3.4
SW2: C9.1 J11.17 R29.1 SW2.3 SW2.4
TX: J10.3 J11.10
UART_5V: J9.1 J10.6
UART_VCC: J9.2 J10.5
VFB: IC7.3 R72.2 R73.1
N03266: C47.1 D17.1(K) IC7.1
N03282: D17.2 D18.2
N03330: C47.2 D19.1(K) IC7.6 L2.1
N03476: C50.1 IC7.4 R71.2
N04796: C29.1 IC4.2
N06030: C32.1 IC5.2
N06584: C35.1 IC6.2
N07455: D4.2 R25.1
N07459: D4.3 R26.1
N07463: D4.4 R27.1
N20141: D21.A R74.2
N20149: D23.A R76.2
N20656: D22.A R75.2
N22947: D24.A R77.2
N23122: D25.A R78.2
N23554: J37.1 R80.1
N24192: C36.2 L1.1 U2.12 U2.13
N24209: C36.1 U2.11
N24328: C41.2 U2.10
N24349: R68.1 R70.2 U2.9
N24371: C40.2 U2.6
N24392: R69.1 U2.5
N24439: C39.2 U2.4
N30628: D5.A R30.2
N30678: D6.A R31.2
N30728: D7.A R33.2
N30778: D8.A R34.2
N30828: D9.A R35.2
N30878: D10.A R36.2
N285601: C32.2 IC5.4
N286201: C29.2 IC4.4
N292081: C35.2 IC6.4

Pads without a net: J10 4; J24 2; J31 11; U2 7 14

## Via types
v1: diameter 0.889, hole 0.508, TOP to BOTTOM, 1098 vias

## Routing (per net, layer and track width the routed paths; a pad name or vN(x,y) marks a point on that pad's centre or on a via; arc(x,y) is an arc through that point)
+3V3: length 275.6
  TOP w0.508: v1(94.44,151.66) 94.44,155.06 94.67,155.29 U4.4
  TOP w1.016: v1(92.61,151.66) v1(94.44,151.66) 94.67,151.43 U4.2 94.67,149.45 93.75,148.54 93.75,148.46 92.41,147.12 92.41,146.91 C54.1 C55.1 ; v1(45.44,106.22) 45.44,112.06 v1(46.99,113.61) 52.38,113.61 52.4,113.59 53.52,113.59 53.54,113.61 v1(54.51,113.61) ; v1(29.48,169.53) 29.48,170.47 29.51,170.51 29.51,177.37 30.53,178.38 R76.1 ; 31.67,63.58 v1(38.46,63.58)
  BOTTOM w1.016: v1(38.46,63.58) 39.12,64.24 39.12,69.34 39.51,69.73 39.51,70.79 39.01,71.28 39.01,80.54 42.81,84.34 42.81,84.62 J16.5 45.52,87.33 45.52,87.46 45.57,87.51 45.57,88.92 45.52,88.97 45.52,97.97 45.44,98.05 v1(45.44,104.34) v1(45.44,106.22) ; J38.3 70.1,148.34 66.09,148.34 65.3,149.12 65.3,153.54 50.7,168.15 30.86,168.15 v1(29.48,169.53) 28.54,169.53 28.5,169.49 7.04,169.49 ; J38.3 77.47,140.97 80.57,140.97 91.26,151.66 v1(92.61,151.66) ; J38.3 68.07,142.9 68.07,135 54.51,121.44 v1(54.51,113.61) 53.54,113.61 53.52,113.59 v1(52.35,113.59) ; 4.5,166.95 7.04,166.95 ; 4.5,166.95 4.5,169.49 7.04,169.49 ; 4.5,166.95 J14.4 ; 7.04,166.95 7.04,169.49 ; 7.04,166.95 J14.3 ; J14.4 J14.2 J14.1 J14.3 ; J14.4 J14.3 ; U1.2 46.99,122.65 v1(46.99,113.61)
+5V: length 282.9
  TOP w0.508: U3.4 84.51,155.29 84.76,155.04 v1(84.76,151.82)
  TOP w1.016: J16.1 v1(34.09,85.67) ; v1(27.99,171.04) 27.99,171.98 28.02,172.01 28.02,182.45 30.05,184.48 R75.1 ; v1(84.76,151.82) 84.76,149.89 U3.2 82.96,148.09 82.96,147.77 82.75,147.56 82.75,147.42 C45.1 ; C45.1 C46.1 ; C45.1 79.96,146.63 v1(76.91,149.68) ; 7.04,155.52 9.04,157.53 v1(9.04,171.04) ; 7.04,155.52 J13.5 ; 7.04,155.52 4.5,155.52 J13.6 ; J13.5 J13.6 ; J13.5 J13.3 ; J13.6 J13.4 ; J13.4 J13.2 J13.1 ; J13.4 J13.3 ; J13.3 J13.1 ; J13.1 8.31,146.63 J38.1 66.73,148.01 66.7,148.03 v1(66.7,149.68) ; v1(31.6,110.54) 33.15,112.09 43.26,112.09 46.09,114.92 46.39,114.92 46.43,114.96 52.93,114.96 v1(52.96,114.94) ; v1(96.96,153.03) U4.3 96.96,148.21 97.21,147.96 C52.1 C53.1
  BOTTOM w1.016: J38.1 66.73,135.56 52.96,121.79 v1(52.96,114.94) ; v1(31.6,110.54) 31.6,92.11 31.56,92.07 31.56,91.01 31.6,90.97 31.6,88.16 v1(34.09,85.67) ; v1(76.91,149.68) v1(66.7,149.68) ; v1(9.04,171.04) v1(27.99,171.04) ; v1(96.96,153.03) 89.36,153.03 88.14,151.82 v1(84.76,151.82)
+10V: length 474.7
  TOP w1.016: J12.4 J12.2 J12.1 ; J12.4 J12.6 ; J12.4 J12.3 ; J12.6 J12.5 ; J12.6 4.5,183.46 7.04,183.46 J12.5 ; J12.5 J12.3 ; v1(104.5,172.31) 108.18,176 R68.2 ; 31.17,156.92 31.17,156.79 32.28,155.68 v1(67.87,155.68) ; 31.17,156.92 30.23,155.98 v1(27.51,155.98) 26.01,155.98 8.22,173.77 8.22,174.66 J12.1 ; 31.17,156.92 R74.1 ; v1(104.5,166.85) C37.2 110.01,166.85 112.95,163.91 C38.1 ; C44.1 C43.1 86.8,146.88 ; v1(90.87,165.14) C48.1 96.24,170.51 96.24,175.08 91.67,179.65 D18.1 88.78,181 88.06,181.71 R72.1 ; v1(90.87,165.14) 93.17,162.85 108.36,162.85 108.37,162.86 C38.1 ; v1(90.87,165.14) C49.1 ; L1.2 121.76,162.23 121.14,162.86 C38.1 ; J16.2 35.03,88.21 35,88.19 v1(34.06,88.19) ; J12.1 J12.3 ; 86.8,146.88 86.8,146.71 86.92,146.59 ; 86.8,146.88 U3.3 86.8,149.83 88.44,151.48 88.44,154.02 89.79,155.37 89.79,159.21 87.05,161.95 C49.1 ; C49.1 85.54,165.14 84.34,163.94 L2.2 v1(74.35,155.7)
  BOTTOM w1.016: v1(104.5,172.31) v1(104.5,166.85) ; J16.6 42.04,90.04 40.61,90.04 J16.2 ; J34.2 119.35,30.84 119.43,30.91 J33.2 119.43,76.2 119.46,76.23 J32.2 119.46,149.99 106.6,162.84 93.18,162.84 v1(90.87,165.14) ; v1(74.35,155.7) 73.41,155.7 73.38,155.68 v1(67.87,155.68) ; v1(34.06,88.19) 34.06,90.95 34.19,91.07 34.19,111.38 31.55,114.02 31.55,116.5 31.46,116.59 31.46,122.52 28.32,125.65 28.32,155.17 v1(27.51,155.98)
AVDD: length 366.9
  TOP w1.016: R43.1 123.88,50.01 123.77,49.91 v1(123.77,48.97) ; 7.04,78.05 v1(14.55,78.05) ; R41.1 123.1,96.08 v1(123.1,94.68) ; v1(121.36,137.59) 80.98,137.59 74.93,143.64 74.93,148.59 J39.1 71.81,153.64 68.05,157.4 44.25,157.4 42.24,159.41 v1(42.24,160.35) ; R42.1 v1(122.35,10.21) ; v1(140.08,61.75) 124.69,61.75 124.68,61.73 v1(123.74,61.73) ; v1(31.24,160.45) 31.24,161.39 31.17,161.47 R78.1 ; v1(22.76,84.96) 15.57,84.96 15.52,84.91 v1(14.58,84.91)
  BOTTOM w1.016: v1(42.24,160.35) 41.3,160.35 41.2,160.45 v1(31.24,160.45) 27.69,160.45 22.76,155.52 22.76,129.31 22.61,129.15 22.61,126.25 22.57,126.21 22.57,125.15 22.61,125.11 22.61,122.95 22.64,122.91 22.64,121.85 22.61,121.81 22.61,90.63 22.69,90.54 22.69,90.02 22.76,89.96 v1(22.76,84.96) ; v1(122.35,10.21) 122.35,11.29 123.77,12.71 v1(123.77,48.97) 123.77,49.91 123.74,49.95 v1(123.74,61.73) 123.74,93.1 123.1,93.74 v1(123.1,94.68) 124.18,95.76 124.18,134.77 v1(121.36,137.59) ; v1(14.55,78.05) 14.55,83.95 14.58,83.97 v1(14.58,84.91) ; RT1.1 v1(140.08,61.75)
GND: length 1191.7
  TOP w1.016: v1(83.9,141.81) 88.16,141.81 88.32,141.96 ; v1(83.9,141.81) 82.96,141.81 82.85,141.71 80.8,141.71 v1(79.98,142.52) ; v1(83.9,141.81) 83.9,143.89 C46.2 C45.2 ; J17.3 J17.1 J17.2 J17.4 ; J17.3 J17.5 ; J17.3 J17.4 ; R9.2 C3.2 123.01,34.2 124.6,32.61 ; 149.73,118.57 149.73,117.91 150.75,116.89 150.75,116.81 150.8,116.81 ; D3.1 v1(150.19,25.05) v1(150.19,25.93) v1(150.19,26.87) ; J17.4 J17.6 ; C7.2 77.85,14.45 77.85,14.01 SW1.2 95.36,12.99 R28.K2 R28.K1 106.06,12.89 R28.1 106.06,18.48 105.69,18.85 C8.2 ; R7.2 C1.2 125.81,127.33 v1(125.81,125.55) ; D23.C D24.C D25.C D21.C ; D23.C 38.79,182.63 38.53,182.88 D22.C 38.53,186.08 38.43,186.18 38.43,190.4 35.84,192.99 J17.7 ; D23.C 67.09,178.38 67.12,178.41 v1(70.33,178.41) D19.2 70.69,180.01 C50.2 ; v1(125.81,44.35) 118.01,44.35 117.14,43.48 117.14,41.38 116.08,40.31 DN3.1 ; v1(79.98,149.25) 80.37,149.64 U3.1 ; Q6.6 152.71,10.99 152.56,11.15 R67.2 ; C9.2 62.51,13.95 63.46,12.99 SW2.2 SW1.1 ; D5.C v1(102.34,109.8) ; C43.2 C44.2 89.18,142.82 88.32,141.96 ; J31.14 109.19,32.61 124.6,32.61 ; v1(93.88,141.96) 98.48,141.96 99.34,142.82 C53.2 C52.2 114.5,146.63 115.62,147.75 DN4.1 116.84,147.75 122.1,153.01 v1(125.81,153.01) ; v1(93.88,141.96) 88.32,141.96 ; v1(93.88,141.96) 93.88,143.71 C55.2 C54.2 ; v1(22.3,42.49) J8.4 J7.4 5.77,41.12 4.27,39.62 4.27,34.33 4.19,34.26 4.19,22.79 4.27,22.72 4.27,22.4 J10.1 ; v1(83.85,186.44) 83.26,187.02 C51.2 ; R62.2 132.02,19.55 132.02,21.5 R61.2 ; C56.2 159.29,170.21 181.53,170.21 187.25,175.92 D20.A ; D6.C 100.38,106.12 v1(102.31,106.12) ; 133.88,113.61 R48.2 R49.2 ; Q5.6 152.71,58.91 151.94,58.14 R59.2 ; v1(101.75,171.15) 103.91,168.99 C37.1 110.38,168.99 110.45,169.06 111.5,169.06 112.95,170.51 C38.2 117.06,171.56 121.44,167.18 127.15,167.18 130.4,163.93 v1(130.4,157) ; J24.1 78.16,110.11 83.72,115.67 v1(125.81,115.67) 126.31,116.18 126.31,116.81 C28.2 127.81,117.17 128.22,117.58 C27.2 ; v1(51.44,123.19) v1(58.27,123.19) ; J17.7 J17.8 J17.6 ; J17.7 J17.5 ; v1(125.81,23.98) 125.15,24.64 C34.2 127.28,25.73 C33.2 ; D7.C 102.06,102.18 v1(102.29,101.96) ; U4.1 v1(91.18,148.44) ; R81.2 C59.2 v1(125.81,138.96) 122.15,135.31 117.78,135.31 116.76,134.29 DN1.1 ; 150.65,116.84 150.65,115.98 150.44,115.77 ; J17.5 J17.6 ; C4.2 v1(22.3,53.92) ; R55.2 R56.2 ; v1(125.76,101.12) 123.95,101.12 113.59,90.75 v1(111.4,90.75) v1(102.21,90.75) D10.C ; J31.1 29.95,67.84 29.95,68.02 28.93,69.04 22.12,69.04 ; SW2.1 SW3.2 49.35,12.99 48.97,13.38 48.97,13.77 48.54,14.2 C10.2 ; 94.26,173.75 94.32,173.75 v1(94.36,173.71) ; 94.26,173.75 94.17,173.84 C49.2 85.54,173.84 v1(82.19,177.19) 82.19,180.29 82.83,180.92 R73.2 v1(84.28,182.19) ; 94.26,173.75 C48.2 ; 150.72,116.81 150.37,116.46 150.37,116.65 150.29,116.72 ; 72.57,142.82 72.57,139.75 72.49,139.67 v1(72.49,138.73) ; v1(125.81,79.04) 125.3,79.04 124.28,80.06 C2.2 R8.2 ; v1(30.2,95.83) 29.73,95.83 29.69,95.8 28.63,95.8 28.59,95.83 7.04,95.83 ; 22.12,69.04 22.15,69.01 v1(22.22,69.01) ; 22.12,69.04 6.78,69.04 5.77,68.02 J18.1 ; v1(22.22,59.13) 20.73,59.13 C6.2 ; D9.C v1(102.21,94.56) ; v1(151.03,67.77) 151.03,68.88 151,68.91 v1(151,68.96) v1(151,70.05) 150.95,70.05 150.19,70.82 D2.1 ; C5.2 v1(22.22,64.08) ; v1(125.81,69.29) 125.81,71.35 C31.2 126.16,71.7 127.79,71.7 128.04,71.45 C30.2 ; DN2.1 116.26,86.97 119.35,90.07 122.58,90.07 122.86,90.35 v1(125.81,90.35) ; D8.C v1(102.29,98.37) ; 124.6,32.61 v1(125.81,32.61) ; v1(151.05,115.87) 151.1,115.82 v1(151.1,114.65) 151.31,114.65 ; R51.2 152.25,106.4 152.71,106.86 Q4.5
  BOTTOM w1.016: v1(93.88,141.96) 91.18,144.66 v1(91.18,148.44) ; R28.1 107.52,18.56 J31.14 ; v1(102.21,90.75) v1(102.21,94.56) 102.21,98.3 v1(102.29,98.37) v1(102.29,101.96) 102.29,105.16 102.31,105.18 v1(102.31,106.12) 102.31,108.76 102.34,108.79 v1(102.34,109.8) ; J31.14 J31.13 22.3,41.17 v1(22.3,42.49) v1(22.3,53.92) 22.3,58.12 22.22,58.19 v1(22.22,59.13) v1(22.22,64.08) v1(22.22,69.01) ; J31.14 J31.15 ; 125.81,101.17 v1(125.81,90.35) v1(125.81,79.04) v1(125.81,69.29) v1(125.81,44.35) v1(125.81,32.61) v1(125.81,23.98) ; 125.81,101.17 v1(125.76,101.12) ; 125.81,101.17 v1(125.81,115.67) v1(125.81,125.55) v1(125.81,138.96) v1(125.81,153.01) 125.81,153.95 128.85,157 v1(130.4,157) 144.42,157 145.03,157.61 ; J31.1 31.67,72.75 32.52,73.6 J31.12 32.52,78.17 32.49,78.21 32.49,85.34 30.2,87.63 v1(30.2,95.83) ; v1(79.98,149.25) v1(79.98,142.52) ; J36.1 145.01,192.13 136.02,183.13 v1(128.42,183.13) ; SW3.1 SW3.2 ; v1(101.75,171.15) 99.19,173.71 v1(94.36,173.71) ; SW2.1 SW2.2 ; v1(70.33,178.41) 77.72,178.41 78.95,177.19 v1(82.19,177.19) ; v1(83.9,141.81) 80.82,138.73 v1(72.49,138.73) 72.49,137.41 v1(58.27,123.19) ; v1(84.28,182.19) 83.85,182.63 v1(83.85,186.44) ; SW1.1 SW1.2 ; U1.1 v1(51.44,123.19)
  vias: v1(3.35,189.05) v1(3.66,70.41) v1(3.81,54.46) v1(3.91,14.58) v1(4.06,196.14) v1(4.17,74.52) v1(4.29,129.34) v1(5.84,73.3) v1(6.07,36.42) v1(7.67,52.5) v1(7.8,48.87) v1(7.98,187.83) v1(8.86,196.37) v1(9.68,132.13) v1(10.26,148.82) v1(10.34,40.13) v1(10.9,173.2) v1(10.87,59.97) v1(10.85,55.63) v1(11.68,114.81) v1(12.42,165.13) v1(12.7,111.35) v1(12.85,103.63) v1(13.64,123.01) v1(13.61,4.01) v1(14,193.45) v1(14.58,136.65) v1(15.06,143.08) v1(15.67,108.15) v1(16.99,109.96) v1(17.88,51.94) v1(18.03,39.8) v1(18.14,95.91) v1(18.29,37.39) v1(18.31,114.83) v1(18.69,21.69) v1(18.62,16.99) v1(19,89.33) v1(18.95,26.24) v1(19.1,103.25) v1(19.1,101.14) v1(19.38,105.69) v1(19.86,111.43) v1(20.02,108.28) v1(20.45,152.91) v1(20.85,132.28) v1(20.95,34.01) v1(20.93,23.77) v1(21.03,124) v1(22.3,13.13) v1(23.9,21.41) v1(24.23,166.24) v1(24.21,74.55) v1(24.46,128.37) v1(24.56,132.46) v1(24.74,122.94) v1(24.79,105.89) v1(24.74,101.42) v1(25.3,29.34) v1(25.88,150.16) v1(26.14,13.21) v1(26.34,89.05) v1(26.85,85.01) v1(27.43,73.08) v1(27.86,17.53) v1(28.35,48.54) v1(29.79,15.77) v1(30,133.15) v1(30.53,136.98) v1(30.68,195.83) v1(31.34,23.9) v1(32.26,125.81) v1(33.2,131.17) v1(33.27,68.4) v1(33.71,59.89) v1(34.04,21.92) v1(34.26,4.11) v1(34.8,114.07) v1(36.4,104.72) v1(36.7,108.43) v1(36.8,133.6) v1(37.34,125.17) v1(37.69,196.01) v1(38.81,21.95) v1(41.15,123.77) v1(41.3,4.32) v1(41.35,171.35) v1(41.43,166.01) v1(41.48,95.25) v1(41.58,114.45) v1(42.8,126.01) v1(43.03,72.01) v1(43.33,107.67) v1(43.82,77.65) v1(43.92,95.99) v1(44.04,90.14) v1(44.53,195.83) v1(44.58,22.05) v1(45.19,134.72) v1(45.36,171.25) v1(45.57,142.39) v1(46.91,77.29) v1(47.07,72.16) v1(47.75,127) v1(47.96,96.11) v1(48.84,84.35) v1(50.16,88.37) v1(50.22,77.37) v1(50.6,21.87) v1(51.16,195.78) v1(51.21,109.25) v1(51.28,93.57) v1(51.82,103.76) v1(53.19,125.53) v1(53.37,71.6) v1(53.64,171.07) v1(54.13,160.86) v1(54.13,83.97) v1(55.35,77.32) v1(55.5,3.99) v1(56.39,111.84) v1(56.54,167.64) v1(57.18,71.91) v1(57.61,21.92) v1(59.11,164.97) v1(59.26,121.62) v1(59.61,77.52) v1(60.45,133.71) v1(60.5,107.49) v1(60.81,195.96) v1(60.86,142.54) v1(61.29,118.67) v1(61.24,22.1) v1(61.87,162) v1(61.98,83.9) v1(63.07,77.77) v1(63.22,105.21) v1(64.92,164.57) v1(64.95,160.02) v1(65.02,172.47) v1(65.07,169.04) v1(65.41,176.63) v1(65.41,114.68) v1(65.41,72.01) v1(66.19,84.2) v1(67.72,100.79) v1(67.92,112.55) v1(68.33,77.7) v1(68.86,21.95) v1(69.01,3.66) v1(70.23,113.36) v1(71.55,108.79) v1(71.65,133.5) v1(72.67,84.12) v1(72.9,77.57) v1(73.2,93.42) v1(74.04,153.59) v1(74.07,72.11) v1(75.11,22.17) v1(75.46,104.83) v1(76.23,161.39) v1(76.99,133.5) v1(77.77,92.74) v1(77.93,113.21) v1(78.44,84.28) v1(78.51,77.65) v1(80.19,151.64) v1(80.44,22.33) v1(81.36,92.58) v1(82.83,84.51) v1(83.46,105.28) v1(83.46,95.94) v1(83.82,184.99) v1(84.45,77.62) v1(84.76,72.54) v1(85.29,161.59) v1(85.34,133.43) v1(85.6,177.47) v1(85.8,186.05) v1(87.71,76.35) v1(87.96,84.12) v1(88.11,22.02) v1(88.47,156.46) v1(88.72,113.82) v1(89.1,103.91) v1(89.31,4.75) v1(89.48,163.35) v1(89.48,100.23) v1(90.07,92.58) v1(90.83,80.72) v1(90.98,177.24) v1(91.49,72.39) v1(93.09,133.48) v1(93.14,78.49) v1(93.83,83.87) v1(94.41,69.16) v1(94.44,22.25) v1(94.77,165.53) v1(95.12,100.23) v1(95.43,80.54) v1(96.52,76.56) v1(96.7,66.85) v1(98.63,149.33) v1(98.81,152.76) v1(98.98,133.71) v1(99.03,113.67) v1(99.26,164.87) v1(99.44,83.9) v1(99.47,73.81) v1(99.49,63.98) v1(99.69,80.34) v1(100.81,62.66) v1(101.73,71.27) v1(101.93,161.37) v1(102.18,141.63) v1(103.56,80.34) v1(103.66,134.06) v1(103.89,69.34) v1(104.42,164.72) v1(104.7,61.04) v1(105.31,94.41) v1(105.49,105.05) v1(105.44,67.59) v1(105.82,90.73) v1(106.4,58.85) v1(106.53,83.87) v1(106.78,97.49) v1(106.83,109.47) v1(107.01,102.54) v1(107.19,80.21) v1(108.41,56.85) v1(108.89,157.51) v1(108.94,65.02) v1(109.09,141.38) v1(109.68,55.47) v1(109.78,94.49) v1(110.21,63.22) v1(110.72,86.08) v1(111.12,37.16) v1(111.28,42.06) v1(111.4,54.15) v1(111.56,51.99) v1(111.53,49.02) v1(111.51,32.66) v1(111.73,79.73) v1(111.76,67.01) v1(111.84,77.19) v1(111.86,72.77) v1(111.84,71.12) v1(111.84,4.17) v1(111.91,74.68) v1(112.06,153.77) v1(112.12,19.25) v1(112.7,182.65) v1(113.13,94.36) v1(113.46,113.82) v1(113.89,97.94) v1(114.05,101.7) v1(114.17,141.22) v1(114.35,109.65) v1(114.71,105.49) v1(115.09,32.84) v1(115.14,62.18) v1(115.11,25.3) v1(115.37,57.25) v1(115.54,51.66) v1(116.87,149.91) v1(118.06,79.15) v1(118.11,70) v1(119.43,14.12) v1(120.32,24.87) v1(120.78,36.14) v1(121.08,103.3) v1(121.01,94.67) v1(121.21,109.78) v1(121.41,51.08) v1(121.41,43.05) v1(121.59,88.16) v1(121.59,78.21) v1(121.59,63.09) v1(121.87,70.56) v1(121.89,30.91) v1(121.95,56.9) v1(122.02,113.59) v1(122.33,183.74) v1(122.38,179.73) v1(122.58,157.81) v1(122.61,109.47) v1(122.61,101.68) v1(122.99,151.18) v1(124.43,145.26) v1(125.27,20.62) v1(125.27,17.07) v1(125.48,11.2) v1(127.25,177.8) v1(128.47,107.54) v1(128.68,93.01) v1(128.65,84.91) v1(128.68,43.61) v1(128.78,45.19) v1(128.85,76.43) v1(129.01,48.74) v1(129.82,138.91) v1(130.18,34.8) v1(130.81,146.71) v1(131.67,80.52) v1(131.65,45.54) v1(133.22,47.17) v1(133.91,41.66) v1(134.8,105.71) v1(135.25,5.33) v1(136.27,90.58) v1(136.4,186.87) v1(136.37,10.06) v1(136.93,63.63) v1(137.03,4.27) v1(137.29,49.17) v1(137.62,84.07) v1(137.87,162.53) v1(137.95,98.83) v1(137.97,57.45) v1(138.2,8.56) v1(138.43,38) v1(138.48,34.87) v1(138.58,195.45) v1(138.68,182.32) v1(138.84,95.15) v1(138.94,175.21) v1(138.99,71.5) v1(139.57,152.4) v1(139.52,138.66) v1(139.85,4.19) v1(140.46,98.81) v1(140.69,8) v1(140.72,104.5) v1(141.12,95.15) v1(141.58,45.62) v1(141.71,50.09) v1(142.06,74.27) v1(142.01,32.89) v1(142.04,20.42) v1(142.37,184.66) v1(142.47,27.23) v1(142.8,4.01) v1(143.08,98.88) v1(143.28,95.17) v1(144.73,7.95) v1(144.83,9.65) v1(145.08,95.17) v1(145.08,4.09) v1(145.24,54.28) v1(145.42,195.63) v1(145.64,181.76) v1(145.69,49.17) v1(146.33,98.91) v1(146.89,170.48) v1(146.89,143.15) v1(146.94,162.99) v1(146.94,152.04) v1(147.04,95.17) v1(147.35,8) v1(148.82,3.86) v1(149.38,98.88) v1(149.58,95.15) v1(150.06,8) v1(150.57,49.91) v1(150.77,116.85) v1(150.95,54.18) v1(151.03,46.18) v1(151.84,95.22) v1(152.58,14.25) v1(152.58,11) v1(152.58,8.79) v1(152.68,62.26) v1(152.68,59) v1(152.68,56.79) v1(152.63,17.37) v1(152.63,16.28) v1(152.6,15.27) v1(152.6,13.21) v1(152.6,12.12) v1(152.6,10.01) v1(152.78,112.04) v1(152.78,110.95) v1(152.76,109.93) v1(152.73,108.92) v1(152.76,107.87) v1(152.76,106.78) v1(152.73,105.66) v1(152.76,104.67) v1(152.73,103.45) v1(152.73,65.38) v1(152.73,64.29) v1(152.7,63.27) v1(152.7,61.21) v1(152.7,60.12) v1(152.7,58.01) v1(153.34,98.88) v1(153.42,3.53) v1(153.7,14.25) v1(153.7,11) v1(153.7,8.79) v1(153.8,62.26) v1(153.8,59) v1(153.8,56.79) v1(153.75,17.37) v1(153.75,16.28) v1(153.72,15.27) v1(153.72,13.21) v1(153.72,12.12) v1(153.72,10.01) v1(153.9,112.04) v1(153.9,110.95) v1(153.87,109.93) v1(153.85,108.92) v1(153.87,107.87) v1(153.87,106.78) v1(153.85,105.66) v1(153.87,104.67) v1(153.85,103.45) v1(153.85,65.38) v1(153.85,64.29) v1(153.82,63.27) v1(153.82,61.21) v1(153.82,60.12) v1(153.82,58.01) v1(154.03,95.05) v1(154.79,15.27) v1(154.76,14.25) v1(154.79,13.21) v1(154.79,12.12) v1(154.76,11) v1(154.79,10.01) v1(154.76,8.79) v1(154.89,63.27) v1(154.86,62.26) v1(154.89,61.21) v1(154.89,60.12) v1(154.86,59) v1(154.89,58.01) v1(154.86,56.79) v1(154.81,17.37) v1(154.81,16.28) v1(154.97,112.04) v1(154.97,110.95) v1(154.94,109.93) v1(154.91,108.92) v1(154.94,107.87) v1(154.94,106.78) v1(154.91,105.66) v1(154.94,104.67) v1(154.91,103.45) v1(154.91,65.38) v1(154.91,64.29) v1(155.22,54.36) v1(155.88,17.4) v1(155.88,16.31) v1(155.85,15.29) v1(155.83,14.27) v1(155.85,13.23) v1(155.85,12.14) v1(155.83,11.02) v1(155.85,10.03) v1(155.83,8.81) v1(155.98,108.94) v1(155.98,105.69) v1(155.98,103.48) v1(155.98,65.41) v1(155.98,64.31) v1(155.96,63.3) v1(155.93,62.28) v1(155.96,61.24) v1(155.96,60.15) v1(155.93,59.03) v1(155.96,58.04) v1(155.93,56.82) v1(156.06,142.7) v1(156.03,112.06) v1(156.03,110.97) v1(156.01,109.96) v1(156.01,107.9) v1(156.01,106.81) v1(156.01,104.7) v1(156.01,50.01) v1(156.36,164.39) v1(156.54,184.23) v1(156.9,14.25) v1(156.9,11) v1(156.9,8.79) v1(157,62.26) v1(157,59) v1(157,56.79) v1(156.95,17.37) v1(156.95,16.28) v1(156.92,15.27) v1(156.92,13.21) v1(156.92,12.12) v1(156.92,10.01) v1(157.1,112.04) v1(157.1,110.95) v1(157.07,109.93) v1(157.05,108.92) v1(157.07,107.87) v1(157.07,106.78) v1(157.05,105.66) v1(157.07,104.67) v1(157.05,103.45) v1(157.05,65.38) v1(157.05,64.29) v1(157.02,63.27) v1(157.02,61.21) v1(157.02,60.12) v1(157.02,58.01) v1(157.18,195.81) v1(157.3,189.26) v1(157.68,54.05) v1(157.99,15.27) v1(157.96,14.25) v1(157.99,13.21) v1(157.99,12.12) v1(157.96,11) v1(157.99,10.01) v1(157.96,8.79) v1(157.96,3.68) v1(158.09,63.27) v1(158.06,62.26) v1(158.09,61.21) v1(158.09,60.12) v1(158.06,59) v1(158.09,58.01) v1(158.06,56.79) v1(158.01,17.37) v1(158.01,16.28) v1(158.17,112.04) v1(158.17,110.95) v1(158.14,109.93) v1(158.12,108.92) v1(158.14,107.87) v1(158.14,106.78) v1(158.12,105.66) v1(158.14,104.67) v1(158.12,103.45) v1(158.12,65.38) v1(158.12,64.29) v1(176.02,8.66) v1(176.35,15.14) v1(176.5,106.32) v1(176.71,135.41) v1(176.78,132.82) v1(176.78,127.05) v1(176.71,60.15) v1(176.94,143.64) v1(176.94,138) v1(177.01,152.45) v1(177.09,148.29) v1(177.01,140.36) v1(177.01,129.69) v1(177.09,100.66) v1(177.09,53.49) v1(177.24,167.79) v1(177.24,164.67) v1(177.24,68.25) v1(177.29,64.41) v1(177.39,189.69) v1(177.32,156.26) v1(177.47,177.09) v1(177.44,172.97) v1(177.47,108.28) v1(177.47,16.31) v1(177.6,10.24) v1(177.62,196.24) v1(177.62,160.15) v1(177.65,116.79) v1(177.7,110.87) v1(177.77,181.31) v1(177.77,113.26) v1(177.83,20.02) v1(177.9,18.29) v1(178,185.06) v1(178,21.69) v1(178.31,3.78) v1(178.64,102.49) v1(179.43,12.24) v1(179.65,55.63) v1(180.54,104.32) v1(180.95,14.33) v1(181.46,111.35) v1(181.46,108.31) v1(181.46,106.1) v1(181.43,58.09) v1(181.56,113.87) v1(181.58,66.85) v1(181.69,116.84) v1(181.66,17.5) v1(181.74,196.49) v1(181.71,63.73) v1(181.74,19.63) v1(181.81,70.31) v1(181.94,60.71) v1(182.09,21.72) v1(182.14,3.86) v1(182.3,183.82) v1(183.06,175.95) v1(185.34,187.93) v1(185.7,3.96) v1(188.49,196.55) v1(189.31,174.75) v1(191.85,187.3) v1(192.71,175.67) v1(192.91,182.42) v1(193.83,3.4) v1(195.58,164.19) v1(195.66,160.68) v1(195.66,152.6) v1(195.73,168.3) v1(195.73,138.15) v1(195.73,133.12) v1(195.73,112.42) v1(195.78,45.97) v1(195.88,156.18) v1(195.88,148.13) v1(195.88,145.16) v1(195.88,141.88) v1(195.81,130) v1(195.81,105.89) v1(195.88,88.21) v1(195.96,65.28) v1(195.94,57.73) v1(195.96,52.27) v1(196.04,84.12) v1(196.01,38.07) v1(196.19,196.49) v1(196.11,184.66) v1(196.11,176.2) v1(196.11,172.24) v1(196.11,100.94) v1(196.11,94.92) v1(196.27,188.16) v1(196.24,18.82) v1(196.24,11.56) v1(196.34,192.41) v1(196.34,6.93) v1(196.49,180.01) v1(196.57,14.71)
VBUS: length 161.9
  TOP w1.016: C42.1 122.57,186.1 121.65,187.02 C39.1 119.91,187.12 R69.2 119.91,191.33 119.55,191.69 ; Q1.7 164.85,133.42
  TOP w1.524: C51.1 74.5,187.02 73.99,186.51 R71.1 ; C51.1 75.77,185.09 ; C51.1 75.77,190.61 76.85,191.69 134.67,191.69 139.73,186.64 ; R79.1 J37.2 134.04,180.95 139.73,186.64 ; 139.73,186.64 162.33,186.64 J35.1
  vias: v1(160.48,135.15) v1(160.48,131.9) v1(160.48,129.69) v1(160.45,128.55) v1(160.48,33.99) v1(160.53,138.28) v1(160.53,137.19) v1(160.5,136.17) v1(160.5,134.11) v1(160.5,133.02) v1(160.5,130.91) v1(160.58,91.62) v1(160.58,90.53) v1(160.55,89.51) v1(160.53,88.49) v1(160.55,87.45) v1(160.55,86.36) v1(160.53,85.24) v1(160.55,84.25) v1(160.53,83.03) v1(160.5,81.89) v1(160.55,43.71) v1(160.55,42.62) v1(160.53,41.61) v1(160.5,40.59) v1(160.53,39.55) v1(160.53,38.46) v1(160.5,37.34) v1(160.53,36.35) v1(160.5,35.13) v1(161.59,128.55) v1(161.67,138.28) v1(161.67,137.19) v1(161.65,136.17) v1(161.62,135.15) v1(161.65,134.11) v1(161.65,133.02) v1(161.62,131.9) v1(161.65,130.91) v1(161.62,129.69) v1(161.7,89.51) v1(161.67,88.49) v1(161.7,87.45) v1(161.7,86.36) v1(161.67,85.24) v1(161.7,84.25) v1(161.67,83.03) v1(161.65,81.89) v1(161.7,43.71) v1(161.7,42.62) v1(161.67,41.61) v1(161.65,40.59) v1(161.67,39.55) v1(161.67,38.46) v1(161.65,37.34) v1(161.67,36.35) v1(161.65,35.13) v1(161.62,33.99) v1(161.72,91.62) v1(161.72,90.53) v1(162.69,135.15) v1(162.69,131.9) v1(162.69,129.69) v1(162.66,128.55) v1(162.69,33.99) v1(162.74,138.28) v1(162.74,137.19) v1(162.71,136.17) v1(162.71,134.11) v1(162.71,133.02) v1(162.71,130.91) v1(162.79,91.62) v1(162.79,90.53) v1(162.76,89.51) v1(162.74,88.49) v1(162.76,87.45) v1(162.76,86.36) v1(162.74,85.24) v1(162.76,84.25) v1(162.74,83.03) v1(162.71,81.89) v1(162.76,43.71) v1(162.76,42.62) v1(162.74,41.61) v1(162.71,40.59) v1(162.74,39.55) v1(162.74,38.46) v1(162.71,37.34) v1(162.74,36.35) v1(162.71,35.13) v1(163.78,136.19) v1(163.75,135.18) v1(163.78,134.14) v1(163.78,133.05) v1(163.75,131.93) v1(163.78,130.94) v1(163.75,129.72) v1(163.73,128.57) v1(163.78,81.92) v1(163.78,40.61) v1(163.78,37.36) v1(163.78,35.15) v1(163.75,34.01) v1(163.8,138.3) v1(163.8,137.21) v1(163.86,91.64) v1(163.86,90.55) v1(163.83,89.54) v1(163.8,88.52) v1(163.83,87.48) v1(163.83,86.39) v1(163.8,85.27) v1(163.83,84.28) v1(163.8,83.06) v1(163.83,43.74) v1(163.83,42.65) v1(163.8,41.63) v1(163.8,39.57) v1(163.8,38.48) v1(163.8,36.37) v1(164.9,136.19) v1(164.87,135.18) v1(164.9,134.14) v1(164.9,133.05) v1(164.87,131.93) v1(164.9,130.94) v1(164.87,129.72) v1(164.85,128.57) v1(164.9,81.92) v1(164.9,40.61) v1(164.9,37.36) v1(164.9,35.15) v1(164.87,34.01) v1(164.92,138.3) v1(164.92,137.21) v1(164.97,91.64) v1(164.97,90.55) v1(164.95,89.54) v1(164.92,88.52) v1(164.95,87.48) v1(164.95,86.39) v1(164.92,85.27) v1(164.95,84.28) v1(164.92,83.06) v1(164.95,43.74) v1(164.95,42.65) v1(164.92,41.63) v1(164.92,39.57) v1(164.92,38.48) v1(164.92,36.37) v1(165.99,138.3) v1(165.99,137.21) v1(165.96,136.19) v1(165.94,135.18) v1(165.96,134.14) v1(165.96,133.05) v1(165.94,131.93) v1(165.96,130.94) v1(165.94,129.72) v1(165.91,128.57) v1(165.99,88.52) v1(165.99,85.27) v1(165.99,83.06) v1(165.96,81.92) v1(165.99,41.63) v1(165.96,40.61) v1(165.99,39.57) v1(165.99,38.48) v1(165.96,37.36) v1(165.99,36.37) v1(165.96,35.15) v1(165.94,34.01) v1(166.04,91.64) v1(166.04,90.55) v1(166.01,89.54) v1(166.01,87.48) v1(166.01,86.39) v1(166.01,84.28) v1(166.01,43.74) v1(166.01,42.65) v1(166.98,128.6) v1(167.06,138.33) v1(167.06,137.24) v1(167.03,136.22) v1(167,135.2) v1(167.03,134.16) v1(167.03,133.07) v1(167,131.95) v1(167.03,130.96) v1(167,129.74) v1(167.08,89.56) v1(167.06,88.54) v1(167.08,87.5) v1(167.08,86.41) v1(167.06,85.29) v1(167.08,84.3) v1(167.06,83.08) v1(167.03,81.94) v1(167.08,43.76) v1(167.08,42.67) v1(167.06,41.66) v1(167.03,40.64) v1(167.06,39.6) v1(167.06,38.51) v1(167.03,37.39) v1(167.06,36.4) v1(167.03,35.18) v1(167,34.04) v1(167.11,91.67) v1(167.11,90.58) v1(168.1,136.19) v1(168.07,135.18) v1(168.1,134.14) v1(168.1,133.05) v1(168.07,131.93) v1(168.1,130.94) v1(168.07,129.72) v1(168.05,128.57) v1(168.1,81.92) v1(168.1,40.61) v1(168.1,37.36) v1(168.1,35.15) v1(168.07,34.01) v1(168.12,138.3) v1(168.12,137.21) v1(168.17,91.64) v1(168.17,90.55) v1(168.15,89.54) v1(168.12,88.52) v1(168.15,87.48) v1(168.15,86.39) v1(168.12,85.27) v1(168.15,84.28) v1(168.12,83.06) v1(168.15,43.74) v1(168.15,42.65) v1(168.12,41.63) v1(168.12,39.57) v1(168.12,38.48) v1(168.12,36.37) v1(169.19,138.3) v1(169.19,137.21) v1(169.16,136.19) v1(169.14,135.18) v1(169.16,134.14) v1(169.16,133.05) v1(169.14,131.93) v1(169.16,130.94) v1(169.14,129.72) v1(169.11,128.57) v1(169.19,88.52) v1(169.19,85.27) v1(169.19,83.06) v1(169.16,81.92) v1(169.19,41.63) v1(169.16,40.61) v1(169.19,39.57) v1(169.19,38.48) v1(169.16,37.36) v1(169.19,36.37) v1(169.16,35.15) v1(169.14,34.01) v1(169.24,91.64) v1(169.24,90.55) v1(169.21,89.54) v1(169.21,87.48) v1(169.21,86.39) v1(169.21,84.28) v1(169.21,43.74) v1(169.21,42.65)
VBUS_LOW: length 186.4
  TOP w0.381: R80.2 127.94,146.86 ; 127.94,146.86 R81.1 ; 127.94,146.86 127.89,146.81 122.76,146.81 ; R81.1 C59.1 ; R81.1 R79.2 ; DN4.3 122.76,146.81 ; 122.76,146.81 122.76,137.37 121.86,136.47 34.77,136.47 24.52,126.22 24.39,126.22 v1(23.85,125.68) ; 7.04,90.75 8.09,90.75 8.32,90.53 23.19,90.53 23.22,90.55 v1(23.98,90.55)
  BOTTOM w0.254: v1(23.98,90.55) 23.98,91.99 23.94,92.03 23.94,97.61 23.57,97.97 23.57,98.77 23.75,98.95 23.75,124.88 23.85,124.98 v1(23.85,125.68)
VDD: length 585.8
  TOP w0.762: J15.3 7.04,139.01 ; J15.3 J15.4 ; J15.3 J15.1 J15.2 J15.4 ; 7.04,139.01 7.04,141.55 4.5,141.55 4.5,139.01 ; 7.04,139.01 4.5,139.01 ; 4.5,139.01 J15.4
  TOP w0.864: v1(116.76,130.05) DN1.2
  TOP w1.016: v1(116.76,37.26) 116.76,37.67 DN3.2 ; DN2.2 116.76,83.64 v1(116.76,82.91) ; DN4.2 v1(116.76,139.32) 81.28,139.32 78.36,142.24 v1(78.36,144.86) ; R28.3 99.79,18.36 R24.2 75.69,19.15 75.69,19.29 75.28,19.71 65.13,19.71 63.78,18.36 R29.2 62.51,18.82 61.7,19.63 61.38,19.63 61.31,19.71 49.89,19.71 R32.2 47.75,19.15 47.75,19.29 47.34,19.71 45.48,19.71 45.45,19.69 27.1,19.69 24.77,17.35 24.77,10.62 24.04,9.89 D4.1 18.15,9.89 15.88,12.17 15.88,31.57 8.59,38.86 8.59,38.98 v1(7.92,39.65) ; 7.04,98.37 v1(24.54,98.37) ; R20.1 R21.1 R18.1 26.09,52.78 23.37,50.06 R17.1 R16.1 20.6,46.05 19.58,45.03 J8.3 J7.3 ; J38.2 C58.1 64.87,138.43 27.13,138.43 26.11,137.41 v1(26.11,136.37) 23.67,133.93 J15.1 ; J38.2 70.97,148.34 72.56,148.34 v1(73.23,147.68) ; J38.2 69.27,151.71 ; v1(31.17,170.21) R77.1
  BOTTOM w1.016: J7.3 7.92,42.88 v1(7.92,39.65) ; v1(73.23,147.68) 75.54,147.68 v1(78.36,144.86) ; v1(31.17,170.21) 31.83,169.54 51.44,169.54 69.27,151.71 ; v1(116.76,139.32) v1(116.76,130.05) v1(116.76,82.91) 116.76,67.57 116.78,67.56 116.78,66.5 116.76,66.49 116.76,52.26 116.83,52.19 116.83,51.13 116.76,51.07 v1(116.76,37.26) 116.76,17.22 114.78,15.24 102.91,15.24 R28.3 ; v1(24.54,98.37) v1(26.11,98.37) 26.11,111.83 26.02,111.91 26.02,112.98 26.07,113.03 26.07,124.51 26.11,124.55 v1(26.11,136.37) 26.11,137.46 v1(26.62,137.97)
0: length 332.3
  TOP w0.508: IC3.7 133.4,51.34 133.29,51.46 133.29,53.85 133.4,53.97 IC3.2 133.4,56.44 132.73,57.1 131.31,57.1 130.86,56.65 IC3.4 ; IC1.7 IC1.2 133.4,100.64 132.75,101.29 131.51,101.29 131.39,101.17 131.27,101.17 130.86,100.76 IC1.4 ; IC2.4 129.59,13 129.82,13.23 129.82,13.24 130.24,13.66 131.48,13.66 132.13,13.01 IC2.2 IC2.7
  TOP w1.016: v1(95,74.35) 104.32,65.03 104.52,65.03 105.61,63.93 105.61,63.73 115.81,53.53 116.32,53.53 116.33,53.52 v1(127.18,53.52) C26.2 130.38,53.52 130.68,53.82 130.68,53.92 130.86,54.09 IC3.4 ; v1(127.43,12.55) 127.51,12.47 127.51,10.77 C25.2 129.06,10.59 129.59,11.13 IC2.4 ; IC1.4 130.86,98.68 130.4,98.22 C24.2 ; v1(48.01,91.44) 35.71,91.44 33.63,93.52 25.54,93.52 25.37,93.69 24.31,93.69 23.91,93.29 C23.2 ; v1(128.65,91.36) 132.05,91.36 133.4,92.71 IC1.7 ; 4.5,78.05 4.5,76.68 9.89,71.29 32.52,71.29 35.62,74.38 v1(41.71,74.38)
  BOTTOM w1.016: R40.2 135.57,54.89 135.53,54.93 134.32,54.93 134.28,54.89 129.49,54.89 128.12,53.52 v1(127.18,53.52) ; v1(48.01,91.44) 48.01,86.08 41.71,79.78 v1(41.71,74.38) 92.88,74.38 92.91,74.35 v1(95,74.35) ; v1(127.43,12.55) 126.77,13.21 126.77,22.53 127.15,22.91 127.15,52.27 127.18,52.3 v1(127.18,53.52) ; v1(128.65,91.36) 127.18,89.89 v1(127.18,53.52)
